# Allegro board design.brd
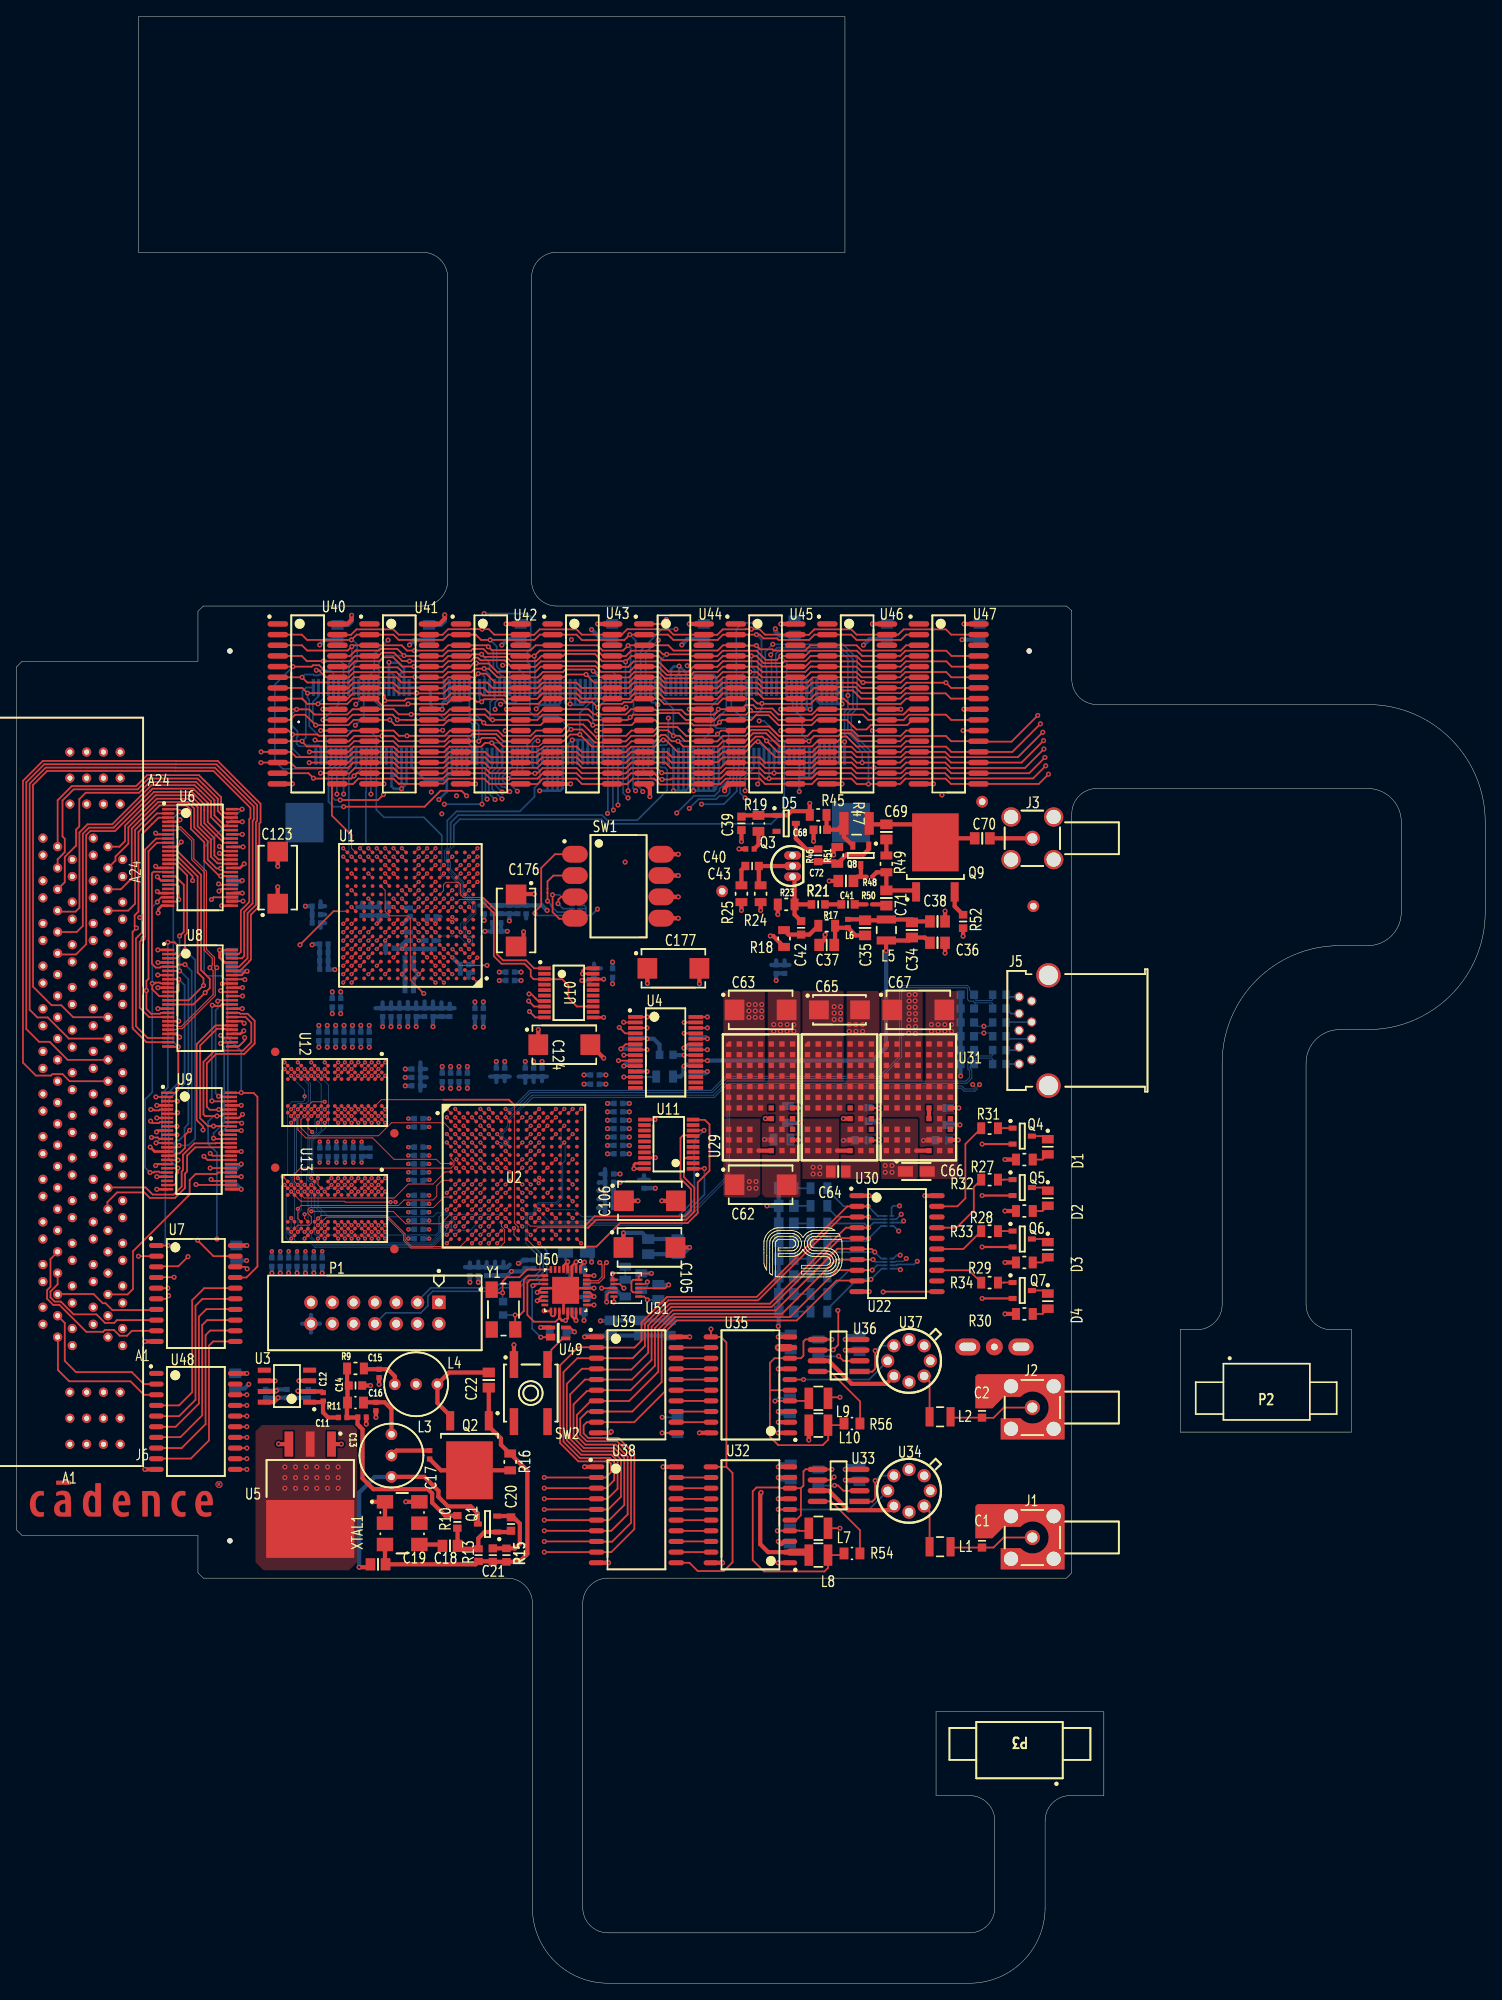
[diagram p0: board, top side]
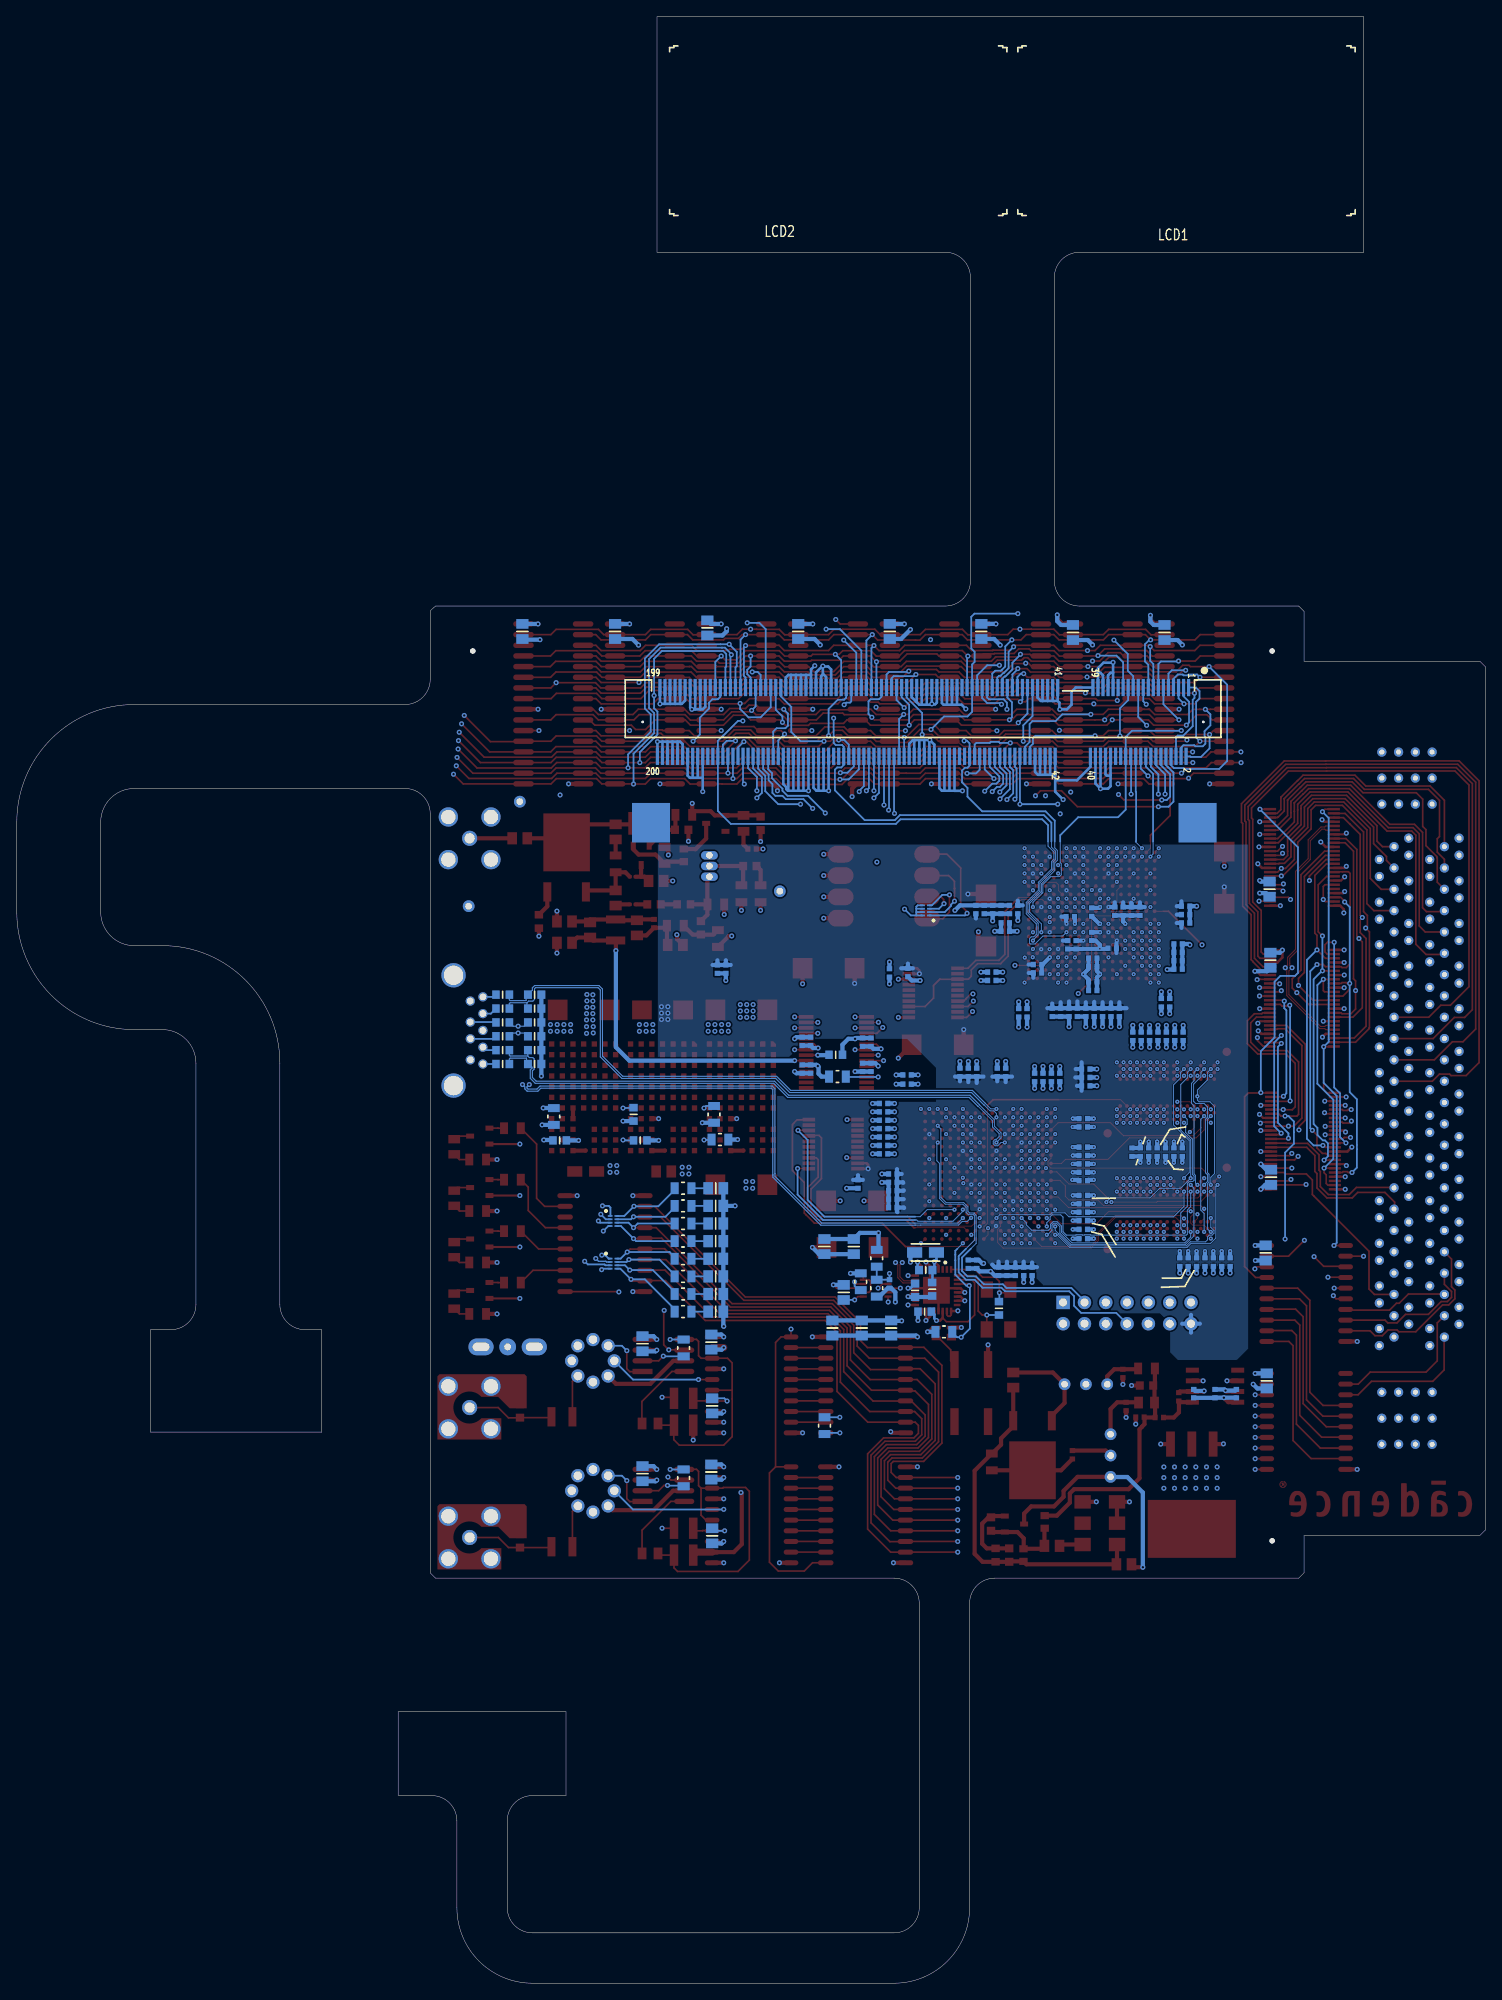
[diagram p1: board, bottom side, seen from below]

Outline 175 x 234.25 mm; copper layers: TOP, GND, INNER1, INNER2, POWER, BOTTOM. Coordinates in mm from the lower left corner of the outline.
Outline path: 0,156.84 0,53.97 0.63,53.34 21.59,53.34 21.59,48.89 22.22,48.26 58.45,48.26 arc(60.57,47.38) 61.45,45.26 61.45,9 arc(64.09,2.64) 70.45,0 113.55,0 arc(119.91,2.64) 122.55,9 122.55,19.35 arc(123.43,21.47) 125.55,22.35 129.55,22.35 129.55,32.35 109.55,32.35 109.55,22.35 113.55,22.35 arc(115.67,21.47) 116.55,19.35 116.55,9 arc(115.67,6.88) 113.55,6 70.45,6 arc(68.33,6.88) 67.45,9 67.45,45.26 arc(68.33,47.38) 70.45,48.26 125.09,48.26 125.73,48.89 125.73,139.32 arc(126.61,141.44) 128.73,142.32 161,142.32 arc(163.83,141.15) 165,138.32 165,127.6 arc(163.83,124.77) 161,123.6 157.65,123.6 arc(147.75,119.5) 143.65,109.6 143.65,80.85 arc(142.77,78.73) 140.65,77.85 138.65,77.85 138.65,65.65 159.05,65.65 159.05,77.85 156.65,77.85 arc(154.53,78.73) 153.65,80.85 153.65,109.6 arc(154.82,112.43) 157.65,113.6 161,113.6 arc(170.9,117.7) 175,127.6 175,138.32 arc(170.9,148.22) 161,152.32 128.73,152.32 arc(126.61,153.2) 125.73,155.32 125.73,163.49 125.09,164.06 64.35,164.06 arc(62.23,164.93) 61.35,167.06 61.35,203.2 arc(62.23,205.32) 64.35,206.2 98.7,206.2 98.7,234.25 14.5,234.25 14.5,206.2 48.35,206.2 arc(50.47,205.32) 51.35,203.2 51.35,167.06 arc(50.47,164.93) 48.35,164.06 22.22,164.06 21.59,163.42 21.59,157.48 0.63,157.48 0,156.84

## Design rules (mm)
constraint set DEFAULT: 
net group CLOCK: nets CLOCK+ CLOCK-
net group D: nets D+ D-
net group DATA1[0..9]: nets DATA1.CLKA DATA1.WSTAT_L
net group DP1: nets DIFF1+ DIFF1-
net group LED1: nets LED1 N828385
net group LED2: nets LED2 N852308
net group LED3: nets LED3 N852494
net group LED4: nets LED4 N852683
net group N62056: nets N62056 N62436
net group RF: nets DDS_OUT Q1E
net group STDA_SSRX: nets STDA_SSRX+ STDA_SSRX-
net group STDA_SSTX: nets STDA_SSTX+ STDA_SSTX-
net group VCLKC: nets CLKC VCLKC
net group ADDRESS: nets A0 A1 A2 A3 A4 A5 A6 A7 A8 A9 A10 A11 A12 A13 A14 A15 A16 A17 A18 A19 A20 A21 A22 A23
net group BUF_OUT: nets BUF_OUT N61996 N62230 N62316 N62564 N81780 N884986 Q2E
net group DATA: nets D0 D1 D2 D3 D4 D5 D6 D7 D9 D10 D11 D12 D13 D14 D15
net group DATA1.VD0: nets DATA1.VD0 N00671 VDX7
net group DATA1.VD1: nets DATA1.VD1 N00689 VDX6
net group DATA1.VD2: nets DATA1.VD2 N00703 VDX5
net group DATA1.VD3: nets DATA1.VD3 N00717 VDX4
net group DATA1.VD4: nets DATA1.VD4 N00827 VDX3
net group DATA1.VD5: nets DATA1.VD5 N00831 VDX2
net group DATA1.VD6: nets DATA1.VD6 N00835 VDX1
net group DATA1.VD7: nets DATA1.VD7 N00837 VDX0
net group DATA[0..20]: nets DATA.BA0 DATA.BA1 DATA.BA2 DATA.BA3 DATA.BD0 DATA.BD1 DATA.BD2 DATA.BD3 DATA.BD4 DATA.BD5 DATA.BD6 DATA.BD7 DATA.BD8 DATA.BD9 DATA.BD12 DATA.BD13 DATA.BD14 DATA.BD15 DATA.CLKB
net group DATA_DIFFS: nets DATA0+ DATA0- DATA1+ DATA1- DATA2+ DATA2- DATA3+ DATA3-
net group DDR_DQ: nets DDR_DQ0 DDR_DQ1 DDR_DQ2 DDR_DQ3 DDR_DQ4 DDR_DQ5 DDR_DQ6 DDR_DQ7 DDR_DQ8 DDR_DQ9 DDR_DQ10 DDR_DQ11 DDR_DQ12 DDR_DQ13 DDR_DQ14 DDR_DQ15 DDR_DQ16 DDR_DQ17 DDR_DQ18 DDR_DQ19 DDR_DQ20 DDR_DQ21 DDR_DQ22 DDR_DQ23 DDR_DQ24 DDR_DQ25 DDR_DQ26 DDR_DQ27 DDR_DQ28 DDR_DQ29 DDR_DQ30 DDR_DQ31
net group DDS[0..10]: nets DDS.DATA0 DDS.DATA1 DDS.DATA2 DDS.DATA3 DDS.DATA4 DDS.DATA5 DDS.DATA6 DDS.DATA7 DDS.FQUD DDS.RESET DDS.WCLK
net group MEMORY[0..29]: nets MEMORY.CTRL.RCS0 MEMORY.CTRL.RCS1 MEMORY.CTRL.RCS2 MEMORY.CTRL.RCS3 MEMORY.CTRL.RWE MEMORY.RA0 MEMORY.RA1 MEMORY.RA2 MEMORY.RA3 MEMORY.RA4 MEMORY.RA5 MEMORY.RA6 MEMORY.RA7 MEMORY.RA8 MEMORY.RA9 MEMORY.RA10 MEMORY.RA11 MEMORY.RA12 MEMORY.RA13 MEMORY.RA14 MEMORY.RA15 MEMORY.RA16 MEMORY.RD0 MEMORY.RD1 MEMORY.RD2 MEMORY.RD3 MEMORY.RD4 MEMORY.RD5 MEMORY.RD6 MEMORY.RD7
net group N00038_USER_DESIGN_OUTPUTS0_DAAMP0: nets N00038_USER_DESIGN_OUTPUTS0_DAAMP0 N00038_USER_DESIGN_OUTPUTS0_DAAMP1 N04966
net group N00046_USER_DESIGN_OUTPUTS0_DAAMP0: nets N00036_USER_DESIGN_OUTPUTS0_DAAMP0 N00046_USER_DESIGN_OUTPUTS0_DAAMP0 N00048_USER_DESIGN_OUTPUTS0_DAAMP0
net group N00046_USER_DESIGN_OUTPUTS0_DAAMP1: nets N00036_USER_DESIGN_OUTPUTS0_DAAMP1 N00046_USER_DESIGN_OUTPUTS0_DAAMP1 N00048_USER_DESIGN_OUTPUTS0_DAAMP1
net group N111881: nets N111502 N111881 N113142 N114006 N118214 N118917 N120412 N121910 N123723 N124926 N129422 N221560
net group POWER_GROUP: nets 5V
net group STEVE: nets N830942

## Placement (name value [footprint] x y rotation side)
C1  47 pF  [CAPC1608X86N]  115.03 52.7 90 top
C2  47 pF  [CAPC1608X86N]  115.03 68.17 90 top
C3  3300 pF  [CAPC2012X71N]  91.7 94.7 180 bottom
C4  3300 pF  [CAPC2012X71N]  91.7 86.3 180 bottom
C5  3300 pF  [CAPC2012X71N]  91.7 92.6 180 bottom
C6  3300 pF  [CAPC2012X71N]  91.7 84.2 180 bottom
C7  3300 pF  [CAPC2012X71N]  91.7 90.5 180 bottom
C8  3300 pF  [CAPC2012X71N]  91.7 82.1 180 bottom
C9  3300 pF  [CAPC2012X71N]  91.7 88.4 180 bottom
C10  3300 pF  [CAPC2012X71N]  91.7 80 180 bottom
C11  1000 pF  [CAPC1005X56N]  38.84 67.39 0 top
C12  1000 pF  [CAPC1005X56N]  36.52 69.85 270 top
C13  1000 pF  [CAPC1005X56N]  41.15 67.43 180 top
C14  0.01 uF  [CAPC1608X86N]  40.36 71.2 180 top
C15  1000 pF  [CAPC1005X56N]  43.18 72.64 90 top
C16  1000 pF  [CAPC1005X56N]  42.8 68.7 90 top
C17  1000 pF  [CAPC1005X56N]  49.2 62.95 270 top
C18  100 pF  [CAPC2012X70N]  51.63 52.1 180 top
C19  22 pF  [CAPC2012X71N]  43.05 49.9 0 top
C20  47 pF  [CAPC1608X86N]  58.9 54.7 90 top
C21  47 pF  [CAPC1608X86N]  56.73 51 90 top
C22  22 pF  [CAPC2012X71N]  56.25 71.85 270 top
C23  1000 pF  [CAPC1005X56N]  73.2 109.1 90 bottom
C24  1000 pF  [CAPC1005X56N]  81.4 108.9 90 bottom
C25  1000 pF  [CAPC1005X56N]  74.2 109.1 90 bottom
C26  1000 pF  [CAPC1005X56N]  80.4 108.9 90 bottom
C27  1000 pF  [CAPC1005X56N]  73.2 112.1 90 bottom
C28  1000 pF  [CAPC1005X56N]  80.4 112.2 90 bottom
C29  1000 pF  [CAPC1005X56N]  81.4 112.2 90 bottom
C30  1000 pF  [CAPC1005X56N]  74.2 112.1 90 bottom
C31  1000 pF  [CAPC1005X56N]  34.74 70.23 270 bottom
C32  1000 pF  [CAPC1005X56N]  32.2 70.23 270 bottom
C33  1000 pF  [CAPC1005X56N]  29.66 70.23 270 bottom
C34  3.3 pF  [CAPC2012X88N]  106.68 125.47 270 top
C35  8.2 pF  [CAPC2012X140N]  101.09 125.72 270 top
C36  22 pF  [CAPC2012X71N]  109.73 123.94 180 top
C37  22 pF  [CAPC2012X71N]  96.52 123.69 0 top
C38  33 pF  [CAPC2012X71N]  109.73 126.48 0 top
C39  0.01 uF  [CAPC1608X86N]  86.36 138.17 90 top
C40  1000 pF  [CAPC1005X56N]  87.38 135.12 0 top
C41  0.01 uF  [CAPC1608X86N]  99.06 128.51 0 top
C42  0.01 uF  [CAPC1608X86N]  93.47 125.72 90 top
C43  0.01 uF  [CAPC1608X86N]  87.63 133.09 0 top
C44  0.1 uF  [CAPC2012X100N]  25.53 96.01 270 bottom
C45  0.1 uF  [CAPC2012X100N]  26.16 86.99 270 bottom
C46  0.1 uF  [CAPC2012X100N]  25.6 121.86 90 bottom
C47  0.1 uF  [CAPC2012X100N]  25.7 130.33 270 bottom
C48  0.1 uF  [CAPC2012X100N]  92.7 161.45 270 bottom
C49  0.1 uF  [CAPC2012X100N]  49.13 160.9 270 bottom
C50  0.1 uF  [CAPC2012X100N]  103.7 161.03 270 bottom
C51  0.1 uF  [CAPC2012X100N]  60.05 161.03 270 bottom
C52  0.1 uF  [CAPC2012X100N]  81.88 161.03 270 bottom
C53  0.1 uF  [CAPC2012X100N]  38.22 160.9 270 bottom
C54  0.1 uF  [CAPC2012X100N]  70.96 161.03 270 bottom
C55  0.1 uF  [CAPC2012X100N]  114.74 161.03 270 bottom
C62  10 uF  [CAPMP7343X310N]  88.65 95.12 0 top
C63  100 uF  [CAPMP7343X310N]  88.65 115.95 0 top
C64  2.2 uF  [CAPC2012X71N]  97.9 96.7 0 top
C65  47 uF  [CAPMP6032X280N]  98.04 115.95 0 top
C66  4.7 uF  [CAPMP3216X180N]  107.2 96.7 0 top
C67  100 uF  [CAPMP7343X310N]  107.44 115.95 0 top
C68  0.01 uF  [CAPC1608X86N]  95.76 137.4 0 top
C69  0.47 uF  [CAPC2012X71N]  103.63 137.15 270 top
C70  0.47 uF  [CAPC2012X71N]  115.06 136.39 0 top
C71  0.47 uF  [CAPC2012X71N]  103.63 129.28 90 top
C72  0.01 uF  [CAPC2012X71N]  98.81 131.31 0 top
C73  22 pF  [CAPC1005X56N]  32.4 85.9 270 bottom
C74  22 pF  [CAPC1005X56N]  31.4 85.9 270 bottom
C75  22 pF  [CAPC1005X56N]  30.4 85.9 270 bottom
C76  22 pF  [CAPC1005X56N]  42.1 99 90 bottom
C77  22 pF  [CAPC1005X56N]  36.1 99 90 bottom
C78  22 pF  [CAPC1005X56N]  37.1 99 90 bottom
C79  22 pF  [CAPC1005X56N]  38.1 99 90 bottom
C80  22 pF  [CAPC1005X56N]  39.1 99 90 bottom
C81  220 pF  [CAPC1005X56N]  42 112.8 90 bottom
C82  220 pF  [CAPC1005X56N]  38 112.8 90 bottom
C83  220 pF  [CAPC1005X56N]  39 112.8 90 bottom
C84  220 pF  [CAPC1005X56N]  40 112.8 90 bottom
C85  2200 pF  [CAPC1005X56N]  47.9 95.6 180 bottom
C86  2200 pF  [CAPC1005X56N]  53.7 107.9 270 bottom
C87  2200 pF  [CAPC1005X56N]  51.7 107.9 270 bottom
C88  2200 pF  [CAPC1005X56N]  52.7 107.9 270 bottom
C89  22 pF  [CAPC1005X56N]  61.6 108.5 90 bottom
C90  22 pF  [CAPC1005X56N]  62.6 108.5 90 bottom
C91  22 pF  [CAPC1005X56N]  35.7 126.3 180 bottom
C92  22 pF  [CAPC1005X56N]  53.35 120.35 180 bottom
C93  22 pF  [CAPC1005X56N]  53.35 121.35 180 bottom
C94  22 pF  [CAPC1005X56N]  44.45 123.3 0 bottom
C95  22 pF  [CAPC1005X56N]  35.7 127.3 180 bottom
C96  22 pF  [CAPC1005X56N]  41.15 127.7 270 bottom
C97  22 pF  [CAPC1005X56N]  47.6 115.65 270 bottom
C98  22 pF  [CAPC1005X56N]  48.6 115.65 270 bottom
C99  220 pF  [CAPC1005X56N]  55 84.8 270 bottom
C100  220 pF  [CAPC1005X56N]  91.5 120.8 270 bottom
C101  220 pF  [CAPC1005X56N]  43.6 115.65 270 bottom
C102  220 pF  [CAPC1005X56N]  44.6 115.65 270 bottom
C103  220 pF  [CAPC1005X56N]  45.6 115.65 270 bottom
C104  220 pF  [CAPC1005X56N]  46.6 115.65 270 bottom
C105  470 uF  [CAPMP7343X430N]  75.4 87.65 0 top
C106  470 uF  [CAPMP7343X430N]  75.45 93.2 0 top
C107  22 pF  [CAPC1005X56N]  46.77 121.09 0 bottom
C108  22 pF  [CAPC1005X56N]  71 120.35 90 bottom
C109  22 pF  [CAPC1005X56N]  59.7 127.9 90 bottom
C110  22 pF  [CAPC1005X56N]  57.7 127.9 90 bottom
C111  22 pF  [CAPC1005X56N]  56.7 127.9 90 bottom
C112  220 pF  [CAPC1005X56N]  36.6 120.8 0 bottom
C113  220 pF  [CAPC1005X56N]  46.77 122.12 0 bottom
C114  220 pF  [CAPC1005X56N]  71.7 103.8 0 bottom
C115  2200 pF  [CAPC1005X56N]  71.7 101.8 0 bottom
C116  2200 pF  [CAPC1005X56N]  49.6 115.65 270 bottom
C117  220 pF  [CAPC1005X56N]  55.7 127.9 270 bottom
C118  220 pF  [CAPC1005X56N]  44.15 127.7 270 bottom
C119  220 pF  [CAPC1005X56N]  50.6 115.65 270 bottom
C120  2200 pF  [CAPC1005X56N]  42.15 127.7 270 bottom
C121  2200 pF  [CAPC1005X56N]  43.15 127.7 270 bottom
C122  2200 pF  [CAPC1005X56N]  49.75 123.7 270 bottom
C123  470 uF  [CAPMP7343X430N]  31.1 131.7 90 top
C124  470 uF  [CAPMP7343X430N]  65.25 111.8 0 top
C125  22 pF  [CAPC1005X56N]  47.9 103 180 bottom
C126  22 pF  [CAPC1005X56N]  47.9 102 180 bottom
C127  22 pF  [CAPC1005X56N]  46.9 124.7 270 bottom
C128  22 pF  [CAPC1005X56N]  46.9 127.6 270 bottom
C129  22 pF  [CAPC1005X56N]  57.2 126.31 0 bottom
C130  220 pF  [CAPC1005X56N]  55.6 115.6 270 bottom
C131  220 pF  [CAPC1005X56N]  54.6 115.6 270 bottom
C132  220 pF  [CAPC1005X56N]  37.6 116.8 270 bottom
C133  2200 pF  [CAPC1005X56N]  71.7 100.8 0 bottom
C134  22 pF  [CAPC1005X56N]  47.9 90.85 180 bottom
C135  22 pF  [CAPC1005X56N]  47.9 98.6 180 bottom
C136  22 pF  [CAPC1005X56N]  47.9 97.6 180 bottom
C137  22 pF  [CAPC1005X56N]  47.9 92.85 180 bottom
C138  22 pF  [CAPC1005X56N]  47.9 91.85 180 bottom
C139  22 pF  [CAPC1005X56N]  41 112.8 90 bottom
C140  220 pF  [CAPC1005X56N]  71.7 104.8 0 bottom
C141  220 pF  [CAPC1005X56N]  71.7 98.8 0 bottom
C142  2200 pF  [CAPC1005X56N]  47.9 99.6 180 bottom
C143  2200 pF  [CAPC1005X56N]  47.9 96.6 180 bottom
C144  22 pF  [CAPC1005X56N]  54 84.8 270 bottom
C145  22 pF  [CAPC1005X56N]  70.6 92.4 0 bottom
C146  22 pF  [CAPC1005X56N]  47.6 108.9 180 bottom
C147  22 pF  [CAPC1005X56N]  48.75 123.7 270 bottom
C148  22 pF  [CAPC1005X56N]  90.5 120.8 270 bottom
C149  22 pF  [CAPC1005X56N]  68.8 120.4 270 bottom
C150  22 pF  [CAPC1005X56N]  74.75 95.2 270 bottom
C151  22 pF  [CAPC1005X56N]  49.45 127.05 180 bottom
C152  22 pF  [CAPC1005X56N]  35.7 128.3 180 bottom
C153  22 pF  [CAPC1005X56N]  51.6 115.65 270 bottom
C154  220 pF  [CAPC1005X56N]  70.6 95.4 0 bottom
C155  220 pF  [CAPC1005X56N]  70.6 94.4 0 bottom
C156  220 pF  [CAPC1005X56N]  47.6 106.9 180 bottom
C157  220 pF  [CAPC1005X56N]  70.6 93.4 0 bottom
C158  220 pF  [CAPC1005X56N]  58.15 108.5 90 bottom
C159  220 pF  [CAPC1005X56N]  60.6 108.5 90 bottom
C160  22 pF  [CAPC1005X56N]  36.6 122.8 0 bottom
C161  22 pF  [CAPC1005X56N]  46.77 119.29 0 bottom
C162  22 pF  [CAPC1005X56N]  58.7 127.9 90 bottom
C163  22 pF  [CAPC1005X56N]  36.6 123.8 0 bottom
C164  22 pF  [CAPC1005X56N]  46.77 118.26 0 bottom
C165  220 pF  [CAPC1005X56N]  58.8 120.45 0 bottom
C166  220 pF  [CAPC1005X56N]  58.8 119.45 0 bottom
C167  220 pF  [CAPC1005X56N]  36.6 121.8 0 bottom
C168  2200 pF  [CAPC1005X56N]  71.7 102.8 0 bottom
C169  2200 pF  [CAPC1005X56N]  60.7 127.9 90 bottom
C170  220 pF  [CAPC1005X56N]  56 84.8 270 bottom
C171  220 pF  [CAPC1005X56N]  47.6 107.9 180 bottom
C172  220 pF  [CAPC1005X56N]  57.15 108.5 90 bottom
C173  2200 pF  [CAPC1005X56N]  70.6 96.4 0 bottom
C174  2200 pF  [CAPC1005X56N]  58 84.8 270 bottom
C175  2200 pF  [CAPC1005X56N]  57 84.8 270 bottom
C176  470 uF  [CAPMP7343X430N]  59.5 126.6 270 top
C177  470 uF  [CAPMP7343X430N]  78.25 120.9 0 top
C178  22 pF  [CAPC1005X56N]  60.6 85.65 270 bottom
C179  22 pF  [CAPC1005X56N]  47.9 89.8 180 bottom
C180  22 pF  [CAPC1005X56N]  47.9 88.7 180 bottom
C181  22 pF  [CAPC1005X56N]  68.9 107.1 180 bottom
C182  22 pF  [CAPC1005X56N]  68.9 108.2 180 bottom
C183  220 pF  [CAPC1005X56N]  57.2 125.31 0 bottom
C184  220 pF  [CAPC1005X56N]  38.6 116.8 270 bottom
C185  220 pF  [CAPC1005X56N]  61.6 85.65 270 bottom
C186  2200 pF  [CAPC1005X56N]  71.7 99.8 0 bottom
C187  22 pF  [CAPC1005X56N]  36.4 85.9 270 bottom
C188  22 pF  [CAPC1005X56N]  40.1 99 90 bottom
C189  22 pF  [CAPC1005X56N]  34.4 85.9 270 bottom
C190  22 pF  [CAPC1005X56N]  33.4 85.9 270 bottom
C191  22 pF  [CAPC1005X56N]  41.1 99 90 bottom
C192  22 pF  [CAPC1005X56N]  35.4 85.9 270 bottom
C193  220 pF  [CAPC1005X56N]  36 112.8 90 bottom
C194  220 pF  [CAPC1005X56N]  37 112.8 90 bottom
C195  2200 pF  [CAPC1005X56N]  50.7 107.9 270 bottom
C196  2200 pF  [CAPC1005X56N]  47.9 93.85 180 bottom
C197  0.1 uF  [CAPC2012X100N]  92.23 60.9 90 bottom
C198  0.1 uF  [CAPC2012X100N]  92.13 53.3 270 bottom
C199  0.1 uF  [CAPC2012X100N]  100.43 60.7 270 bottom
C200  0.1 uF  [CAPC2012X100N]  92.23 76.38 90 bottom
C201  0.1 uF  [CAPC2012X100N]  92.13 68.78 270 bottom
C202  0.1 uF  [CAPC2012X100N]  100.43 76.18 270 bottom
C2000  33 pF  [CAPC1608X86N]  113.28 114.45 180 bottom
C2001  33 pF  [CAPC1608X86N]  113.28 112.8 180 bottom
C2002  33 pF  [CAPC1608X86N]  113.28 116.11 180 bottom
C2003  33 pF  [CAPC1608X86N]  113.28 117.76 180 bottom
C2004  33 pF  [CAPC1608X86N]  113.28 109.5 180 bottom
C2005  33 pF  [CAPC1608X86N]  113.28 111.15 180 bottom
C2006  0.1 uF  [CAPC2012X100N]  26.04 71.75 270 bottom
C2007  0.01 uF  [CAPC1608X86N]  67.94 82.55 270 bottom
C2008  22 uF  [CAPMP3216X120N]  66.7 87.05 0 bottom
C2009  0.01 uF  [CAPC1608X86N]  66.67 84.96 0 bottom
C2010  1000 pF  [CAPC1005X56N]  70.99 83.31 270 bottom
C2011  0.1 uF  [CAPC2012X100N]  77.8 78.05 270 bottom
C2012  0.1 uF  [CAPC2012X100N]  74.3 78.05 270 bottom
C2013  0.1 uF  [CAPC2012X100N]  70.8 78.05 270 bottom
C2014  0.1 uF  [CAPC2012X100N]  78.75 87.75 270 bottom
C2015  0.1 uF  [CAPC2012X100N]  75.25 87.75 270 bottom
C2016  0.1 uF  [CAPC2012X100N]  76.45 82.29 90 bottom
D1  GREEN  [LEDC2012X120N]  122.87 99.64 270 top
D2  GREEN  [LEDC2012X120N]  122.87 93.51 270 top
D3  GREEN  [LEDC2012X120N]  122.87 87.38 270 top
D4  GREEN  [LEDC2012X120N]  122.87 81.25 270 top
D5  MMBD4148  [SOT95P230X109-3N]  91.69 138.17 0 top
J1  901-9894-RFX  [SMB_90]  121.03 53.1 270 top
J2  901-9894-RFX  [SMB_90]  121.03 68.58 270 top
J3  901-9894-RFX  [SMB_90]  121.03 136.39 270 top
J5  AU-Y1005-3-R  [USB3A_FEMALE]  119.45 113.5 90 top
J6  6367550-6  [C-1367550-6]  6.33 64.2 90 top
J7  1473005-1  [C_1_1473005_1_J1]  66.85 150.25 270 bottom
L1  47 nH  [INDC2520X220N]  110.03 52 0 top
L2  47 nH  [INDC2520X220N]  110.03 67.48 0 top
L3  INDUCTOR3  [TOROID01_3]  44.65 65.4 270 top
L4  INDUCTOR3  [TOROID01_3]  45.05 71.35 0 top
L5  1.0 uH  [INDC2520X220N]  103.63 125.47 90 top
L6  6.8 nH  [INDC1005X60N]  99.06 126.23 270 top
L7  56 nH  [IND_CENTRAL_1008]  95.53 54.2 180 top
L8  56 nH  [IND_CENTRAL_1008]  95.53 51 0 top
L9  56 nH  [IND_CENTRAL_1008]  95.53 69.68 180 top
L10  56 nH  [IND_CENTRAL_1008]  95.53 66.48 0 top
LCD1  S1D13742F01A200  [LCD_EA_8081-A3N-B]  35.6 220.68 180 bottom
LCD2  S1D13742F01A200  [LCD_EA_8081-A3N-B]  77.1 220.68 180 bottom
NOREF  -  []  25.4 52.7 0 top
NOREF#2  -  []  -0.13 150.49 0 top
NOREF#3  -  [unnamed#2]  25.4 52.7 0 top
NOREF#4  -  [unnamed#3]  116.5 75.8 0 top
NOREF#5  -  [unnamed#2]  120.65 158.7 0 top
NOREF#6  -  [unnamed#4]  70.6 121.7 0 top
NOREF#7  -  [unnamed#2]  25.4 158.7 0 top
NOREF#8  -  []  25.4 52.7 0 top
P1  TST-107-01-G-D  [SAMTEC_TST-107-XX-X-D]  50.3 81.1 180 top
P2  53261-0819  [MOLEX_53261-8_FITNAIL]  148.9 69.7 0 top
P3  53261-0819  [MOLEX_53261-8_FITNAIL]  119.55 28.51 180 top
Q1  2N2222AUB  [SOT95P230X109-3N]  56.1 54.7 180 top
Q2  MMBFJ310LT1G  [TO230P950X240-3N]  53.95 62.9 270 top
Q3  2N3866  [TO92]  92.46 131.82 180 top
Q4  KST3904  [SOT95P240X114-3N]  119.82 100.91 0 top
Q5  KST3904  [SOT95P240X114-3N]  119.82 94.78 0 top
Q6  KST3904  [SOT95P240X114-3N]  119.82 88.65 0 top
Q7  KST3904  [SOT95P240X114-3N]  119.82 82.52 0 top
Q8  2N3905  [SOT95P230X109-3N]  100.58 134.36 270 top
Q9  2N5179-NRC  [TO230P950X240-3N]  109.47 134.1 90 top
R1  243 Ohm  [RESC2012X60N]  95.6 94.7 0 bottom
R2  243 Ohm  [RESC2012X60N]  95.6 86.3 0 bottom
R3  243 Ohm  [RESC2012X60N]  95.6 92.6 0 bottom
R4  243 Ohm  [RESC2012X60N]  95.6 84.2 0 bottom
R5  243 Ohm  [RESC2012X60N]  95.6 90.5 0 bottom
R6  243 Ohm  [RESC2012X60N]  95.6 82.1 0 bottom
R7  243 Ohm  [RESC2012X60N]  95.6 88.4 0 bottom
R8  243 Ohm  [RESC2012X60N]  95.6 80 0 bottom
R9  330 Ohm  [RESC2012X60N]  40.36 73.23 180 top
R10  10 kOhm  [RESC1608X50N]  52.5 54.95 90 top
R11  97.6 Ohm  [RESC2012X70N]  40.36 69.17 0 top
R12  2.0 kOhm  [RESC1608X55N]  77.4 110.6 0 bottom
R13  10 kOhm  [RESC1608X50N]  55.03 51 90 top
R14  3.9 kOhm  [RESC2012X50N]  77.2 108 180 bottom
R15  2.0 kOhm  [RESC1608X55N]  58.35 51 90 top
R16  220 Ohm  [RESC2012X60N]  58.8 62.1 270 top
R17  180 Ohm  [RESC2012X60N]  96.52 125.97 180 top
R18  56 Ohm  [RESC2012X60N]  91.44 124.45 90 top
R19  97.6 Ohm  [RESC2012X70N]  88.39 138.17 90 top
R21  2.0 kOhm  [RESC1608X55N]  95.5 128.51 0 top
R23  470 Ohm  [RESC2012X60N]  91.69 128.51 0 top
R24  56 Ohm  [RESC2012X60N]  88.65 129.78 90 top
R25  56 Ohm  [RESC2012X60N]  86.36 129.78 90 top
R26  49.9 Ohm  [RESC2012X60N]  78.74 66.42 270 bottom
R27  470 Ohm  [RESC2012X60N]  120.08 98.12 0 top
R28  470 Ohm  [RESC2012X60N]  120.08 91.99 0 top
R29  470 Ohm  [RESC2012X60N]  120.08 85.86 0 top
R30  470 Ohm  [RESC2012X60N]  120.08 79.73 0 top
R31  150 Ohm  [RESC2012X60N]  115.94 101.85 0 top
R32  150 Ohm  [RESC2012X60N]  115.94 95.72 0 top
R33  150 Ohm  [RESC2012X60N]  115.94 89.59 0 top
R34  150 Ohm  [RESC2012X60N]  115.94 83.46 0 top
R39  105 kOhm  [RESC2012X60N]  91.9 103.5 270 bottom
R40  -  [RESC2012X60N]  91.2 100.5 180 bottom
R41  61.9 kOhm  [RESC1608X55N]  101.5 103.5 270 bottom
R42  226 kOhm  [RESC1608X55N]  100.7 100.4 180 bottom
R43  118 kOhm  [RESC2012X60N]  111 103.25 270 bottom
R44  154 kOhm  [RESC1608X55N]  110.3 100.4 180 bottom
R45  470 Ohm  [RESC2012X60N]  95.5 139.18 180 top
R46  3.0 kOhm  [RESC1608X50N]  95.5 134.36 90 top
R47  270 Ohm  [RESC3225X70N]  100.08 138.17 180 top
R48  24 kOhm  [RESC0603X26N]  101.6 131.82 180 top
R49  470 Ohm  [RESC2012X60N]  103.63 133.34 90 top
R50  49.9 Ohm  [RESC0603X30N]  101.6 128.51 0 top
R51  6.8 kOhm  [RESC2012X60N]  97.79 134.36 90 top
R52  3.3 Ohm  [RESC1608X55N]  112.78 126.48 90 top
R53  97.6 Ohm  [RESC2012X50N]  95.53 60.2 270 bottom
R54  97.6 Ohm  [RESC2012X70N]  99.53 51.2 0 top
R55  97.6 Ohm  [RESC2012X50N]  95.53 75.68 270 bottom
R56  97.6 Ohm  [RESC2012X70N]  99.53 66.67 0 top
R2000  27.4 Ohm  [RESC1608X55N]  117.09 112.8 180 bottom
R2001  27.4 Ohm  [RESC1608X55N]  117.09 114.45 180 bottom
R2002  27.4 Ohm  [RESC1608X55N]  117.09 117.76 180 bottom
R2003  27.4 Ohm  [RESC1608X55N]  117.09 116.11 180 bottom
R2004  27.4 Ohm  [RESC1608X55N]  117.09 111.15 180 bottom
R2005  27.4 Ohm  [RESC1608X55N]  117.09 109.5 180 bottom
R2006  10  [RESC1608X55N]  65.91 82.67 90 bottom
R2007  2.0 kOhm  [RESC1608X55N]  66.8 80 0 bottom
R2008  100 kOhm  [RESC2012X60N]  64.52 77.59 180 bottom
R2009  2.0 kOhm  [RESC1608X55N]  57.95 80.4 90 bottom
R2010  10 kOhm  [RESC2012X60N]  72.52 86.36 270 bottom
R2011  10 kOhm  [RESC2012X60N]  72.52 82.8 270 bottom
R2012  100 kOhm  [RESC2012X60N]  74.42 83.56 270 bottom
RN1  47 Ohms  [RESNET_8]  66.65 127.8 0 bottom
RN2  100 Ohm  [RESNET_8]  103.89 85.72 180 bottom
RN3  100 Ohm  [RESNET_8]  103.89 90.8 180 bottom
SW1  76HPSB04GWRT  [SOIC254P1077X800-8M]  71.12 130.68 0 top
SW2  EVQPH  [SW_EVQ-PH_NO_GND]  61.25 70.3 0 top
U1  XC6SLX25-3FTG256  [FT256]  46.9 127.2 180 top
U2  XC6SLX25-3FTG256  [FT256]  59.25 96.15 0 top
U3  L78L08ACD13TR  [SOIC127P600X175-8N]  32.2 71.12 180 top
U4  AD9850BRSZ  [SOP65P780X200-28N]  77.32 110.88 0 top
U5  LM340  [TO254P1410X464-4N]  34.97 58.22 270 top
U6  74ALVT16245DGG,118  [SOP50P810X110-48N]  21.84 134.11 0 top
U7  74ACT245  [SOIC127P1028X265-20N]  21.34 82.16 0 top
U8  74ALVT16245DGG,118  [SOP50P810X110-48N]  21.84 117.34 0 top
U9  74ALVT16245DGG,118  [SOP50P810X110-48N]  21.72 100.33 0 top
U10  XCF01SVOG20C  [XCF01SVOG20]  65.79 117.98 0 top
U11  XCF01SVOG20C  [XCF01SVOG20]  77.7 99.95 180 top
U12  MT47H64M16HR-3:G TR  [MT47H128M]  37.9 106.1 270 top
U13  MT47H64M16HR-3:G TR  [MT47H128M]  37.9 92.3 270 top
U22  74HCT574  [SOIC127P1032X265-20AN]  104.9 88.1 0 top
U29  LTM8025EV#PBF  [LTUMODULE7X11]  88.65 105.53 0 top
U30  LTM8025EV#PBF  [LTUMODULE7X11]  98.04 105.53 0 top
U31  LTM8025EV#PBF  [LTUMODULE7X11]  107.44 105.53 0 top
U32  TLC5602CDWR  [SOIC127P1028X265-20N]  87.43 55.8 180 top
U33  DG419CY+  [SOG0508WG244L225]  100.43 57.4 90 top
U34  TLE2037AQDRG4Q1  [TO99]  106.33 61.2 180 top
U35  TLC5602CDWR  [SOIC127P1028X265-20N]  87.43 71.28 180 top
U36  DG419CY+  [SOG0508WG244L225]  100.43 72.88 90 top
U37  TLE2037AQDRG4Q1  [TO99]  106.33 76.68 180 top
U38  74HCT574  [SOIC127P1032X265-20AN]  73.84 55.8 0 top
U39  74HCT574  [SOIC127P1032X265-20AN]  73.84 71.28 0 top
U40  UPD431000AGW-B15  [SOJ127P866X375-32N]  34.66 152.39 0 top
U41  UPD431000AGW-B15  [SOJ127P866X375-32N]  45.58 152.39 0 top
U42  UPD431000AGW-B15  [SOJ127P866X375-32N]  56.49 152.39 0 top
U43  UPD431000AGW-B15  [SOJ127P866X375-32N]  67.41 152.39 0 top
U44  UPD431000AGW-B15  [SOJ127P866X375-32N]  78.32 152.39 0 top
U45  UPD431000AGW-B15  [SOJ127P866X375-32N]  89.23 152.39 0 top
U46  UPD431000AGW-B15  [SOJ127P866X375-32N]  100.15 152.39 0 top
U47  UPD431000AGW-B15  [SOJ127P866X375-32N]  111.06 152.39 0 top
U48  74ACT245  [SOIC127P1028X265-20N]  21.34 66.92 0 top
U49  MAX6711S  [SOT343N]  64.52 77.47 0 top
U50  NBC12429AMNR4G  [QFN50P500X500X100-33N]  65.41 82.55 270 top
U51  TPS51200DRCR  [DRC10_2P4X1P65]  72.64 82.8 0 top
XTAL1  100 MHz  [OSCSC254P500X700X200-6N]  45.93 54.8 0 top
Y1  20 MHz  [OSCCC350X600X120N]  58 80.25 0.2 top

## Library data of the parts
C1 = CAP: room: CHAN1
C2 = CAP: room: CHAN2
C3-C10 = CAP: signal model: DEFAULT_CAPACITOR_3300pF_1_2
C11-C13 C15-C17 C31-C33 = CAP: signal model: DEFAULT_CAPACITOR_1000pF_1_2
C14 = CAP: signal model: DEFAULT_CAPACITOR_10000pF_1_2
C18 = CAP: signal model: DEFAULT_CAPACITOR_100.000000pF_1_2
C19 C22 C73-C80 C89-C98 C125-C129 C134-C139 C144-C153 C178-C182 C187-C192 = CAP: signal model: DEFAULT_CAPACITOR_22.000000pF_1_2
C20 C21 = CAP: signal model: DEFAULT_CAPACITOR_47.000000pF_1_2
C23-C30 C107-C115 C160-C168 C2000-C2005 C2007 C2009-C2016 = CAP
C34-C43 = CAP: room: RF-AMP
C44-C47 C2006 = CAP: signal model: DEFAULT_CAPACITOR_100000pF_1_2
C48-C55 = CAP: signal model: DEFAULT_CAPACITOR_100000pF_1_2; room: BOTTOM_MEM
C62 = CAP_P: signal model: DEFAULT_CAPACITOR_1e+07pF_1_2
C63 = CAP_P: signal model: DEFAULT_CAPACITOR_1e+08pF_1_2
C64 = CAP: signal model: DEFAULT_CAPACITOR_2.2e+06pF_1_2
C65 = CAP_P: signal model: DEFAULT_CAPACITOR_4.7e+07pF_1_2
C66 = CAP_P: signal model: DEFAULT_CAPACITOR_4.7e+06pF_1_2
C67 C2008 = CAP_P
C68 C72 = CAP: signal model: DEFAULT_CAPACITOR_10000pF_1_2; room: RF-AMP
C69-C71 = CAP: signal model: DEFAULT_CAPACITOR_470000pF_1_2; room: RF-AMP
C81-C84 C99-C104 C117-C119 C130-C132 C140 C141 C154-C159 C170-C172 C183-C185 C193 C194 = CAP: signal model: DEFAULT_CAPACITOR_220.000000pF_1_2
C85-C88 C116 C120-C122 C133 C142 C143 C169 C173-C175 C186 C195 C196 = CAP: signal model: DEFAULT_CAPACITOR_2200pF_1_2
C105 C106 C123 C124 C176 C177 = CAP_P: signal model: DEFAULT_CAPACITOR_4.7e+08pF_1_2
C197-C199 = CAP: signal model: DEFAULT_CAPACITOR_100000pF_1_2; room: CHAN1
C200-C202 = CAP: signal model: DEFAULT_CAPACITOR_100000pF_1_2; room: CHAN2
D1-D4 = LED
D5 = DIODE_A_NC_C: room: RF-AMP
J1 = BNC-4: User Part Number: PSL-00000003; room: CHAN1
J2 = BNC-4: User Part Number: PSL-00000003; room: CHAN2
J3 = BNC-4: User Part Number: PSL-00000003
J5 = usb3a_female: User Part Number: PSL-00000013
J6 = CONN_C1367550_6
J7 = conn_dimm_200: room: BOTTOM_MEM
L1 = IND: room: CHAN1
L2 = IND: room: CHAN2
L3 L4 = INDUCTOR3
L5 L6 = IND: room: RF-AMP
L7 L8 = IND: signal model: DEFAULT_INDUCTOR_56.000000nH_1_2; room: CHAN1
L9 L10 = IND: signal model: DEFAULT_INDUCTOR_56.000000nH_1_2; room: CHAN2
LCD1 LCD2 = LCD-EA-8081-A3N
P1 = HDR_2X7_M
P2 P3 = HDR_1X8_M
Q1 Q4-Q7 = BJT_NPN_BEC
Q2 = MOSFET_I_EN_GSD
Q3 Q9 = BJT_NPN_BEC: room: RF-AMP
Q8 = BJT_PNP_BCE: room: RF-AMP
R1-R8 = RES: signal model: DEFAULT_RESISTOR_243.000000OHM_1_2
R9 = RES: signal model: DEFAULT_RESISTOR_330.000000OHM_1_2
R10 R13 = RES: signal model: DEFAULT_RESISTOR_10000OHM_1_2
R11 = RES: signal model: DEFAULT_RESISTOR_97.600000OHM_1_2
R12 R15 = RES: signal model: DEFAULT_RESISTOR_2000OHM_1_2
R14 = RES: signal model: DEFAULT_RESISTOR_3900OHM_1_2
R16 = RES: signal model: DEFAULT_RESISTOR_220.000000OHM_1_2
R17-R19 R21 R23-R25 = RES: room: RF-AMP
R26 = RES: signal model: DEFAULT_RESISTOR_49.900000OHM_1_2
R27-R30 = RES: signal model: DEFAULT_RESISTOR_470.000000OHM_1_2
R31-R34 = RES: signal model: DEFAULT_RESISTOR_150.000000OHM_1_2
R39 = RES: signal model: DEFAULT_RESISTOR_105000OHM_1_2
R40 = RES_RESC2012X60N_DISCRETE_953 KOHM_PSL-00000020: signal model: DEFAULT_RESISTOR_953000OHM_1_2
R41 = RES: signal model: DEFAULT_RESISTOR_61900OHM_1_2
R42 = RES: signal model: DEFAULT_RESISTOR_226000OHM_1_2
R43 = RES: signal model: DEFAULT_RESISTOR_118000OHM_1_2
R44 = RES: signal model: DEFAULT_RESISTOR_154000OHM_1_2
R45 R49 = RES: signal model: DEFAULT_RESISTOR_470.000000OHM_1_2; room: RF-AMP
R46 = RES: signal model: DEFAULT_RESISTOR_3000OHM_1_2; room: RF-AMP
R47 = RES: signal model: DEFAULT_RESISTOR_270.000000OHM_1_2; room: RF-AMP
R48 = RES: signal model: DEFAULT_RESISTOR_24000OHM_1_2; room: RF-AMP
R50 = RES: signal model: DEFAULT_RESISTOR_49.900000OHM_1_2; room: RF-AMP
R51 = RES: signal model: DEFAULT_RESISTOR_6800OHM_1_2; room: RF-AMP
R52 = RES: signal model: DEFAULT_RESISTOR_3.300000OHM_1_2; room: RF-AMP
R53 R54 = RES: signal model: DEFAULT_RESISTOR_97.600000OHM_1_2; room: CHAN1
R55 R56 = RES: signal model: DEFAULT_RESISTOR_97.600000OHM_1_2; room: CHAN2
R2000-R2012 = RES
RN1 = RES_net_8
RN2 RN3 = RES_net_8: signal model: DEFAULT_RESISTOR_PACK_4_100.000000OHM
SW1 = SW DIP-4/SM
SW2 = SW_SPST_13_24
U1 = DemoG_Interface
U2 = DemoG_CoProc
U3 = LM78L05_SO8
U4 = AD9850
U5 = VREG_TGND
U6 U8 U9 = FCT16245
U7 U48 = 74-245_20P
U10 U11 = xcf01svog20
U12 U13 = MT47H64M16
U22 U38 U39 = FF_D_8X_OE3S_20P
U29-U31 = LTM8025
U32 = TLC5602A: room: CHAN1
U33 = DG419A: room: CHAN1
U34 = TLE2037A: room: CHAN1
U35 = TLC5602A: room: CHAN2
U36 = DG419A: room: CHAN2
U37 = TLE2037A: room: CHAN2
U40-U47 = uPD431000AGW-B15: room: MEM
U49 = MAX6711
U50 = NBC12429
U51 = TPS51200
XTAL1 = OSC_SEL383
Y1 = OSC4_24NC

## Footprints (pads in the part's own frame, mm; a bottom-side part is the same pattern mirrored in y, then rotated)
C-1367550-6
  round 1.1 hole 0.6: (0,0) (0,-2) (0,-4) (0,-6) (3.1,0) (3.1,-2) (3.1,-4) (3.1,-6) (6.2,0) (6.2,-2) (6.2,-4) (6.2,-6) (76.26,0) (76.26,-2) (76.26,-4) (76.26,-6) (79.36,0) (79.36,-2) (79.36,-4) (79.36,-6) (82.46,0) (82.46,-2) (82.46,-4) (82.46,-6) A1(11.755,-6.29) A2(13.785,-6.29) A3(16.835,-6.29) A4(18.865,-6.29) A5(21.915,-6.29) A6(23.945,-6.29) A7(26.995,-6.29) A8(29.025,-6.29) A9(32.075,-6.29) A10(34.105,-6.29) A11(37.155,-6.29) A12(39.185,-6.29) A13(42.235,-6.29) A14(44.265,-6.29) A15(47.315,-6.29) A16(49.345,-6.29) A17(52.395,-6.29) A18(54.425,-6.29) A19(57.475,-6.29) A20(59.505,-6.29) A21(62.555,-6.29) A22(64.585,-6.29) A23(67.635,-6.29) A24(69.665,-6.29) B1(12.77,-4.54) B2(15.31,-4.54) B3(17.85,-4.54) B4(20.39,-4.54) B5(22.93,-4.54) B6(25.47,-4.54) B7(28.01,-4.54) B8(30.55,-4.54) B9(33.09,-4.54) B10(35.63,-4.54) B11(38.17,-4.54) B12(40.71,-4.54) B13(43.25,-4.54) B14(45.79,-4.54) B15(48.33,-4.54) B16(50.87,-4.54) B17(53.41,-4.54) B18(55.95,-4.54) B19(58.49,-4.54) B20(61.03,-4.54) B21(63.57,-4.54) B22(66.11,-4.54) B23(68.65,-4.54) B24(71.19,-4.54) C1(14.295,-2.79) C2(16.325,-2.79) C3(19.375,-2.79) C4(21.405,-2.79) C5(24.455,-2.79) C6(26.485,-2.79) C7(29.535,-2.79) C8(31.565,-2.79) C9(34.615,-2.79) C10(36.645,-2.79) C11(39.695,-2.79) C12(41.725,-2.79) C13(44.775,-2.79) C14(46.805,-2.79) C15(49.855,-2.79) C16(51.885,-2.79) C17(54.935,-2.79) C18(56.965,-2.79) C19(60.015,-2.79) C20(62.045,-2.79) C21(65.095,-2.79) C22(67.125,-2.79) C23(70.175,-2.79) C24(72.205,-2.79) D1(11.755,-0.29) D2(13.785,-0.29) D3(16.835,-0.29) D4(18.865,-0.29) D5(21.915,-0.29) D6(23.945,-0.29) D7(26.995,-0.29) D8(29.025,-0.29) D9(32.075,-0.29) D10(34.105,-0.29) D11(37.155,-0.29) D12(39.185,-0.29) D13(42.235,-0.29) D14(44.265,-0.29) D15(47.315,-0.29) D16(49.345,-0.29) D17(52.395,-0.29) D18(54.425,-0.29) D19(57.475,-0.29) D20(59.505,-0.29) D21(62.555,-0.29) D22(64.585,-0.29) D23(67.635,-0.29) D24(69.665,-0.29) E1(12.77,1.46) E2(15.31,1.46) E3(17.85,1.46) E4(20.39,1.46) E5(22.93,1.46) E6(25.47,1.46) E7(28.01,1.46) E8(30.55,1.46) E9(33.09,1.46) E10(35.63,1.46) E11(38.17,1.46) E12(40.71,1.46) E13(43.25,1.46) E14(45.79,1.46) E15(48.33,1.46) E16(50.87,1.46) E17(53.41,1.46) E18(55.95,1.46) E19(58.49,1.46) E20(61.03,1.46) E21(63.57,1.46) E22(66.11,1.46) E23(68.65,1.46) E24(71.19,1.46) F1(14.295,3.21) F2(16.325,3.21) F3(19.375,3.21) F4(21.405,3.21) F5(24.455,3.21) F6(26.485,3.21) F7(29.535,3.21) F8(31.565,3.21) F9(34.615,3.21) F10(36.645,3.21) F11(39.695,3.21) F12(41.725,3.21) F13(44.775,3.21) F14(46.805,3.21) F15(49.855,3.21) F16(51.885,3.21) F17(54.935,3.21) F18(56.965,3.21) F19(60.015,3.21) F20(62.045,3.21) F21(65.095,3.21) F22(67.125,3.21) F23(70.175,3.21) F24(72.205,3.21)
C_1_1473005_1_J1
  round 0.3 hole 1.1 unplated: (0,-33.55) (0,33.25)
  rect 4.7x4.53 smd: (12,-32.565) (12,32.565)
  rect 2.05x0.38 smd: 1(-4.1,31.5) 2(4.1,31.2) 3(-4.1,30.9) 4(4.1,30.6) 5(-4.1,30.3) 6(4.1,30) 7(-4.1,29.7) 8(4.1,29.4) 9(-4.1,29.1) 10(4.1,28.8) 11(-4.1,28.5) 12(4.1,28.2) 13(-4.1,27.9) 14(4.1,27.6) 15(-4.1,27.3) 16(4.1,27) 17(-4.1,26.7) 18(4.1,26.4) 19(-4.1,26.1) 20(4.1,25.8) 21(-4.1,25.5) 22(4.1,25.2) 23(-4.1,24.9) 24(4.1,24.6) 25(-4.1,24.3) 26(4.1,24) 27(-4.1,23.7) 28(4.1,23.4) 29(-4.1,23.1) 30(4.1,22.8) 31(-4.1,22.5) 32(4.1,22.2) 33(-4.1,21.9) 34(4.1,21.6) 35(-4.1,21.3) 36(4.1,21) 37(-4.1,20.7) 38(4.1,20.4) 39(-4.1,20.1) 40(4.1,19.8) 41(-4.1,15.9) 42(4.1,15.6) 43(-4.1,15.3) 44(4.1,15) 45(-4.1,14.7) 46(4.1,14.4) 47(-4.1,14.1) 48(4.1,13.8) 49(-4.1,13.5) 50(4.1,13.2) 51(-4.1,12.9) 52(4.1,12.6) 53(-4.1,12.3) 54(4.1,12) 55(-4.1,11.7) 56(4.1,11.4) 57(-4.1,11.1) 58(4.1,10.8) 59(-4.1,10.5) 60(4.1,10.2) 61(-4.1,9.9) 62(4.1,9.6) 63(-4.1,9.3) 64(4.1,9) 65(-4.1,8.7) 66(4.1,8.4) 67(-4.1,8.1) 68(4.1,7.8) 69(-4.1,7.5) 70(4.1,7.2) 71(-4.1,6.9) 72(4.1,6.6) 73(-4.1,6.3) 74(4.1,6) 75(-4.1,5.7) 76(4.1,5.4) 77(-4.1,5.1) 78(4.1,4.8) 79(-4.1,4.5) 80(4.1,4.2) 81(-4.1,3.9) 82(4.1,3.6) 83(-4.1,3.3) 84(4.1,3) 85(-4.1,2.7) 86(4.1,2.4) 87(-4.1,2.1) 88(4.1,1.8) 89(-4.1,1.5) 90(4.1,1.2) 91(-4.1,0.9) 92(4.1,0.6) 93(-4.1,0.3) 94(4.1,0) 95(-4.1,-0.3) 96(4.1,-0.6) 97(-4.1,-0.9) 98(4.1,-1.2) 99(-4.1,-1.5) 100(4.1,-1.8) 101(-4.1,-2.1) 102(4.1,-2.4) 103(-4.1,-2.7) 104(4.1,-3) 105(-4.1,-3.3) 106(4.1,-3.6) 107(-4.1,-3.9) 108(4.1,-4.2) 109(-4.1,-4.5) 110(4.1,-4.8) 111(-4.1,-5.1) 112(4.1,-5.4) 113(-4.1,-5.7) 114(4.1,-6) 115(-4.1,-6.3) 116(4.1,-6.6) 117(-4.1,-6.9) 118(4.1,-7.2) 119(-4.1,-7.5) 120(4.1,-7.8) 121(-4.1,-8.1) 122(4.1,-8.4) 123(-4.1,-8.7) 124(4.1,-9) 125(-4.1,-9.3) 126(4.1,-9.6) 127(-4.1,-9.9) 128(4.1,-10.2) 129(-4.1,-10.5) 130(4.1,-10.8) 131(-4.1,-11.1) 132(4.1,-11.4) 133(-4.1,-11.7) 134(4.1,-12) 135(-4.1,-12.3) 136(4.1,-12.6) 137(-4.1,-12.9) 138(4.1,-13.2) 139(-4.1,-13.5) 140(4.1,-13.8) 141(-4.1,-14.1) 142(4.1,-14.4) 143(-4.1,-14.7) 144(4.1,-15) 145(-4.1,-15.3) 146(4.1,-15.6) 147(-4.1,-15.9) 148(4.1,-16.2) 149(-4.1,-16.5) 150(4.1,-16.8) 151(-4.1,-17.1) 152(4.1,-17.4) 153(-4.1,-17.7) 154(4.1,-18) 155(-4.1,-18.3) 156(4.1,-18.6) 157(-4.1,-18.9) 158(4.1,-19.2) 159(-4.1,-19.5) 160(4.1,-19.8) 161(-4.1,-20.1) 162(4.1,-20.4) 163(-4.1,-20.7) 164(4.1,-21) 165(-4.1,-21.3) 166(4.1,-21.6) 167(-4.1,-21.9) 168(4.1,-22.2) 169(-4.1,-22.5) 170(4.1,-22.8) 171(-4.1,-23.1) 172(4.1,-23.4) 173(-4.1,-23.7) 174(4.1,-24) 175(-4.1,-24.3) 176(4.1,-24.6) 177(-4.1,-24.9) 178(4.1,-25.2) 179(-4.1,-25.5) 180(4.1,-25.8) 181(-4.1,-26.1) 182(4.1,-26.4) 183(-4.1,-26.7) 184(4.1,-27) 185(-4.1,-27.3) 186(4.1,-27.6) 187(-4.1,-27.9) 188(4.1,-28.2) 189(-4.1,-28.5) 190(4.1,-28.8) 191(-4.1,-29.1) 192(4.1,-29.4) 193(-4.1,-29.7) 194(4.1,-30) 195(-4.1,-30.3) 196(4.1,-30.6) 197(-4.1,-30.9) 198(4.1,-31.2) 199(-4.1,-31.5) 200(4.1,-31.8)
CAPC1005X56N
  rect 0.6x0.65 smd: 1(-0.5,0) 2(0.5,0)
CAPC1608X86N
  rect 0.95x1 smd: 1(-0.8,0) 2(0.8,0)
CAPC2012X70N
  rect 1.15x1.45 smd: 1(-0.9,0) 2(0.9,0)
CAPC2012X71N
  rect 1.15x1.45 smd: 1(-0.9,0) 2(0.9,0)
CAPC2012X88N
  rect 1.15x1.45 smd: 1(-0.9,0) 2(0.9,0)
CAPC2012X100N
  rect 1.15x1.45 smd: 1(-0.9,0) 2(0.9,0)
CAPC2012X140N
  rect 1.15x1.45 smd: 1(-0.9,0) 2(0.9,0)
CAPMP3216X120N
  rect 1.8x1.25 smd: 1(-1.3,0) 2(1.3,0)
CAPMP3216X180N
  rect 1.8x1.25 smd: 1(-1.3,0) 2(1.3,0)
CAPMP6032X280N
  rect 2.35x2.25 smd: 1(-2.45,0) 2(2.45,0)
CAPMP7343X310N
  rect 2.35x2.45 smd: 1(-3.1,0) 2(3.1,0)
CAPMP7343X430N
  rect 2.35x2.45 smd: 1(-3.1,0) 2(3.1,0)
DRC10_2P4X1P65
  rect 0.85x0.28 smd: 1(-1.475,1) 2(-1.475,0.5) 3(-1.475,0) 4(-1.475,-0.5) 5(-1.475,-1) 6(1.475,-1) 7(1.475,-0.5) 8(1.475,0) 9(1.475,0.5) 10(1.475,1)
FT256
  round 0.45 smd: A1(-7.5,7.5) A2(-6.5,7.5) A3(-5.5,7.5) A4(-4.5,7.5) A5(-3.5,7.5) A6(-2.5,7.5) A7(-1.5,7.5) A8(-0.5,7.5) A9(0.5,7.5) A10(1.5,7.5) A11(2.5,7.5) A12(3.5,7.5) A13(4.5,7.5) A14(5.5,7.5) A15(6.5,7.5) A16(7.5,7.5) B1(-7.5,6.5) B2(-6.5,6.5) B3(-5.5,6.5) B4(-4.5,6.5) B5(-3.5,6.5) B6(-2.5,6.5) B7(-1.5,6.5) B8(-0.5,6.5) B9(0.5,6.5) B10(1.5,6.5) B11(2.5,6.5) B12(3.5,6.5) B13(4.5,6.5) B14(5.5,6.5) B15(6.5,6.5) B16(7.5,6.5) C1(-7.5,5.5) C2(-6.5,5.5) C3(-5.5,5.5) C4(-4.5,5.5) C5(-3.5,5.5) C6(-2.5,5.5) C7(-1.5,5.5) C8(-0.5,5.5) C9(0.5,5.5) C10(1.5,5.5) C11(2.5,5.5) C12(3.5,5.5) C13(4.5,5.5) C14(5.5,5.5) C15(6.5,5.5) C16(7.5,5.5) D1(-7.5,4.5) D2(-6.5,4.5) D3(-5.5,4.5) D4(-4.5,4.5) D5(-3.5,4.5) D6(-2.5,4.5) D7(-1.5,4.5) D8(-0.5,4.5) D9(0.5,4.5) D10(1.5,4.5) D11(2.5,4.5) D12(3.5,4.5) D13(4.5,4.5) D14(5.5,4.5) D15(6.5,4.5) D16(7.5,4.5) E1(-7.5,3.5) E2(-6.5,3.5) E3(-5.5,3.5) E4(-4.5,3.5) E5(-3.5,3.5) E6(-2.5,3.5) E7(-1.5,3.5) E8(-0.5,3.5) E9(0.5,3.5) E10(1.5,3.5) E11(2.5,3.5) E12(3.5,3.5) E13(4.5,3.5) E14(5.5,3.5) E15(6.5,3.5) E16(7.5,3.5) F1(-7.5,2.5) F2(-6.5,2.5) F3(-5.5,2.5) F4(-4.5,2.5) F5(-3.5,2.5) F6(-2.5,2.5) F7(-1.5,2.5) F8(-0.5,2.5) F9(0.5,2.5) F10(1.5,2.5) F11(2.5,2.5) F12(3.5,2.5) F13(4.5,2.5) F14(5.5,2.5) F15(6.5,2.5) F16(7.5,2.5) G1(-7.5,1.5) G2(-6.5,1.5) G3(-5.5,1.5) G4(-4.5,1.5) G5(-3.5,1.5) G6(-2.5,1.5) G7(-1.5,1.5) G8(-0.5,1.5) G9(0.5,1.5) G10(1.5,1.5) G11(2.5,1.5) G12(3.5,1.5) G13(4.5,1.5) G14(5.5,1.5) G15(6.5,1.5) G16(7.5,1.5) H1(-7.5,0.5) H2(-6.5,0.5) H3(-5.5,0.5) H4(-4.5,0.5) H5(-3.5,0.5) H6(-2.5,0.5) H7(-1.5,0.5) H8(-0.5,0.5) H9(0.5,0.5) H10(1.5,0.5) H11(2.5,0.5) H12(3.5,0.5) H13(4.5,0.5) H14(5.5,0.5) H15(6.5,0.5) H16(7.5,0.5) J1(-7.5,-0.5) J2(-6.5,-0.5) J3(-5.5,-0.5) J4(-4.5,-0.5) J5(-3.5,-0.5) J6(-2.5,-0.5) J7(-1.5,-0.5) J8(-0.5,-0.5) J9(0.5,-0.5) J10(1.5,-0.5) J11(2.5,-0.5) J12(3.5,-0.5) J13(4.5,-0.5) J14(5.5,-0.5) J15(6.5,-0.5) J16(7.5,-0.5) K1(-7.5,-1.5) K2(-6.5,-1.5) K3(-5.5,-1.5) K4(-4.5,-1.5) K5(-3.5,-1.5) K6(-2.5,-1.5) K7(-1.5,-1.5) K8(-0.5,-1.5) K9(0.5,-1.5) K10(1.5,-1.5) K11(2.5,-1.5) K12(3.5,-1.5) K13(4.5,-1.5) K14(5.5,-1.5) K15(6.5,-1.5) K16(7.5,-1.5) L1(-7.5,-2.5) L2(-6.5,-2.5) L3(-5.5,-2.5) L4(-4.5,-2.5) L5(-3.5,-2.5) L6(-2.5,-2.5) L7(-1.5,-2.5) L8(-0.5,-2.5) L9(0.5,-2.5) L10(1.5,-2.5) L11(2.5,-2.5) L12(3.5,-2.5) L13(4.5,-2.5) L14(5.5,-2.5) L15(6.5,-2.5) L16(7.5,-2.5) M1(-7.5,-3.5) M2(-6.5,-3.5) M3(-5.5,-3.5) M4(-4.5,-3.5) M5(-3.5,-3.5) M6(-2.5,-3.5) M7(-1.5,-3.5) M8(-0.5,-3.5) M9(0.5,-3.5) M10(1.5,-3.5) M11(2.5,-3.5) M12(3.5,-3.5) M13(4.5,-3.5) M14(5.5,-3.5) M15(6.5,-3.5) M16(7.5,-3.5) N1(-7.5,-4.5) N2(-6.5,-4.5) N3(-5.5,-4.5) N4(-4.5,-4.5) N5(-3.5,-4.5) N6(-2.5,-4.5) N7(-1.5,-4.5) N8(-0.5,-4.5) N9(0.5,-4.5) N10(1.5,-4.5) N11(2.5,-4.5) N12(3.5,-4.5) N13(4.5,-4.5) N14(5.5,-4.5) N15(6.5,-4.5) N16(7.5,-4.5) P1(-7.5,-5.5) P2(-6.5,-5.5) P3(-5.5,-5.5) P4(-4.5,-5.5) P5(-3.5,-5.5) P6(-2.5,-5.5) P7(-1.5,-5.5) P8(-0.5,-5.5) P9(0.5,-5.5) P10(1.5,-5.5) P11(2.5,-5.5) P12(3.5,-5.5) P13(4.5,-5.5) P14(5.5,-5.5) P15(6.5,-5.5) P16(7.5,-5.5) R1(-7.5,-6.5) R2(-6.5,-6.5) R3(-5.5,-6.5) R4(-4.5,-6.5) R5(-3.5,-6.5) R6(-2.5,-6.5) R7(-1.5,-6.5) R8(-0.5,-6.5) R9(0.5,-6.5) R10(1.5,-6.5) R11(2.5,-6.5) R12(3.5,-6.5) R13(4.5,-6.5) R14(5.5,-6.5) R15(6.5,-6.5) R16(7.5,-6.5) T1(-7.5,-7.5) T2(-6.5,-7.5) T3(-5.5,-7.5) T4(-4.5,-7.5) T5(-3.5,-7.5) T6(-2.5,-7.5) T7(-1.5,-7.5) T8(-0.5,-7.5) T9(0.5,-7.5) T10(1.5,-7.5) T11(2.5,-7.5) T12(3.5,-7.5) T13(4.5,-7.5) T14(5.5,-7.5) T15(6.5,-7.5) T16(7.5,-7.5)
IND_CENTRAL_1008
  rect 1.02x2.54 smd: 1(-1.145,0) 2(1.145,0)
INDC1005X60N
  rect 0.6x0.7 smd: 1(-0.5,0) 2(0.5,0)
INDC2520X220N
  rect 0.95x2.3 smd: 1(-1.25,0) 2(1.25,0)
LEDC2012X120N
  rect 1x1.4 smd: A(0.9,0) C(-0.9,0)
LTUMODULE7X11
  custom 0.636x0.636 smd: A1(-3.81,6.35)
  rect 0.635x0.635 smd: A2(-2.54,6.35) A3(-1.27,6.35) A4(0,6.35) A5(1.27,6.35) A6(2.54,6.35) A7(3.81,6.35) B1(-3.81,5.08) B2(-2.54,5.08) B3(-1.27,5.08) B4(0,5.08) B5(1.27,5.08) B6(2.54,5.08) B7(3.81,5.08) C1(-3.81,3.81) C2(-2.54,3.81) C3(-1.27,3.81) C4(0,3.81) C5(1.27,3.81) C6(2.54,3.81) C7(3.81,3.81) D1(-3.81,2.54) D2(-2.54,2.54) D3(-1.27,2.54) D4(0,2.54) D5(1.27,2.54) D6(2.54,2.54) D7(3.81,2.54) E1(-3.81,1.27) E2(-2.54,1.27) E3(-1.27,1.27) E4(0,1.27) E5(1.27,1.27) E6(2.54,1.27) E7(3.81,1.27) F1(-3.81,0) F2(-2.54,0) F3(-1.27,0) F4(0,0) F5(1.27,0) F6(2.54,0) F7(3.81,0) G1(-3.81,-1.27) G2(-2.54,-1.27) G3(-1.27,-1.27) G4(0,-1.27) G5(1.27,-1.27) G6(2.54,-1.27) G7(3.81,-1.27) H5(1.27,-2.54) H6(2.54,-2.54) H7(3.81,-2.54) J1(-3.81,-3.81) J2(-2.54,-3.81) J3(-1.27,-3.81) J5(1.27,-3.81) J6(2.54,-3.81) J7(3.81,-3.81) K1(-3.81,-5.08) K2(-2.54,-5.08) K3(-1.27,-5.08) K5(1.27,-5.08) K6(2.54,-5.08) K7(3.81,-5.08) L1(-3.81,-6.35) L2(-2.54,-6.35) L3(-1.27,-6.35) L5(1.27,-6.35) L6(2.54,-6.35) L7(3.81,-6.35)
MT47H128M
  round 1 smd: (-4.85,-7.1) (4.85,7.1)
  round 0.45 smd: A1(-3.2,5.6) A2(-2.4,5.6) A3(-1.6,5.6) A7(1.6,5.6) A8(2.4,5.6) A9(3.2,5.6) B1(-3.2,4.8) B2(-2.4,4.8) B3(-1.6,4.8) B7(1.6,4.8) B8(2.4,4.8) B9(3.2,4.8) C1(-3.2,4) C2(-2.4,4) C3(-1.6,4) C7(1.6,4) C8(2.4,4) C9(3.2,4) D1(-3.2,3.2) D2(-2.4,3.2) D3(-1.6,3.2) D7(1.6,3.2) D8(2.4,3.2) D9(3.2,3.2) E1(-3.2,2.4) E2(-2.4,2.4) E3(-1.6,2.4) E7(1.6,2.4) E8(2.4,2.4) E9(3.2,2.4) F1(-3.2,1.6) F2(-2.4,1.6) F3(-1.6,1.6) F7(1.6,1.6) F8(2.4,1.6) F9(3.2,1.6) G1(-3.2,0.8) G2(-2.4,0.8) G3(-1.6,0.8) G7(1.6,0.8) G8(2.4,0.8) G9(3.2,0.8) H1(-3.2,0) H2(-2.4,0) H3(-1.6,0) H7(1.6,0) H8(2.4,0) H9(3.2,0) J1(-3.2,-0.8) J2(-2.4,-0.8) J3(-1.6,-0.8) J7(1.6,-0.8) J8(2.4,-0.8) J9(3.2,-0.8) K2(-2.4,-1.6) K3(-1.6,-1.6) K7(1.6,-1.6) K8(2.4,-1.6) K9(3.2,-1.6) L1(-3.2,-2.4) L2(-2.4,-2.4) L3(-1.6,-2.4) L7(1.6,-2.4) L8(2.4,-2.4) M2(-2.4,-3.2) M3(-1.6,-3.2) M7(1.6,-3.2) M8(2.4,-3.2) M9(3.2,-3.2) N1(-3.2,-4) N2(-2.4,-4) N3(-1.6,-4) N7(1.6,-4) N8(2.4,-4) P2(-2.4,-4.8) P3(-1.6,-4.8) P7(1.6,-4.8) P8(2.4,-4.8) P9(3.2,-4.8) R1(-3.2,-5.6) R2(-2.4,-5.6) R3(-1.6,-5.6) R7(1.6,-5.6) R8(2.4,-5.6)
OSCCC350X600X120N
  rect 1.45x1.95 smd: 1(-1.4,2.376) 2(-1.4,-2.374) 3(1.4,-2.374) 4(1.4,2.376)
OSCSC254P500X700X200-6N
  rect 1.95x1.6 smd: 1(-2.05,2.541) 2(-2.05,0.001) 3(-2.05,-2.539) 4(2.05,-2.539) 5(2.05,0.001) 6(2.05,2.541)
QFN50P500X500X100-33N
  rect 0.8x0.3 smd: 1(-2.475,1.75) 2(-2.475,1.25) 3(-2.475,0.75) 4(-2.475,0.25) 5(-2.475,-0.25) 6(-2.475,-0.75) 7(-2.475,-1.25) 8(-2.475,-1.75) 17(2.475,-1.75) 18(2.475,-1.25) 19(2.475,-0.75) 20(2.475,-0.25) 21(2.475,0.25) 22(2.475,0.75) 23(2.475,1.25) 24(2.475,1.75)
  rect 0.3x0.8 smd: 9(-1.75,-2.475) 10(-1.25,-2.475) 11(-0.75,-2.475) 12(-0.25,-2.475) 13(0.25,-2.475) 14(0.75,-2.475) 15(1.25,-2.475) 16(1.75,-2.475) 25(1.75,2.475) 26(1.25,2.475) 27(0.75,2.475) 28(0.25,2.475) 29(-0.25,2.475) 30(-0.75,2.475) 31(-1.25,2.475) 32(-1.75,2.475)
  rect 3.2x3.2 smd: 33(0,0)
RESC0603X26N
  rect 0.45x0.4 smd: 1(-0.35,0) 2(0.35,0)
RESC0603X30N
  rect 0.45x0.4 smd: 1(-0.35,0) 2(0.35,0)
RESC1608X50N
  rect 0.85x1 smd: 1(-0.75,0) 2(0.75,0)
RESC1608X55N
  rect 0.9x1 smd: 1(-0.8,0) 2(0.8,0)
RESC2012X50N
  rect 0.95x1.45 smd: 1(-1,0) 2(1,0)
RESC2012X60N
  rect 0.95x1.4 smd: 1(-1,0) 2(1,0)
RESC2012X70N
  rect 1.05x1.4 smd: 1(-0.95,0) 2(0.95,0)
RESC3225X70N
  rect 1.1x2.7 smd: 1(-1.5,0) 2(1.5,0)
RESNET_8
  rect 0.55x0.2 smd: 1(-0.4,0.6) 2(-0.4,0.2) 3(-0.4,-0.2) 4(-0.4,-0.6) 5(0.4,-0.6) 6(0.4,-0.2) 7(0.4,0.2) 8(0.4,0.6)
SAMTEC_TST-107-XX-X-D
  rect 1.6x1.6 hole 0.95: 1(0,0)
  round 1.6 hole 0.95: 2(0,2.54) 3(2.54,0) 4(2.54,2.54) 5(5.08,0) 6(5.08,2.54) 7(7.62,0) 8(7.62,2.54) 9(10.16,0) 10(10.16,2.54) 11(12.7,0) 12(12.7,2.54) 13(15.24,0) 14(15.24,2.54)
SMB_90
  round 1.8 hole 1.2: 1(0,0)
  round 2.3 hole 1.7: 2(-2.54,2.54) 3(2.54,2.54) 4(-2.54,-2.54) 5(2.54,-2.54)
SOG0508WG244L225
  rect 0.635x2.388 smd: 1(0,0)
  oval 0.635x2.388 smd: 2(1.27,0) 3(2.54,0) 4(3.81,0) 5(3.81,4.978) 6(2.54,4.978) 7(1.27,4.978) 8(0,4.978)
SOIC127P600X175-8N
  rect 1.55x0.6 smd: 1(-2.7,1.905) 2(-2.7,0.635) 3(-2.7,-0.635) 4(-2.7,-1.905) 5(2.7,-1.905) 6(2.7,-0.635) 7(2.7,0.635) 8(2.7,1.905)
SOIC127P1028X265-20N
  oval 1.75x0.6 smd: 1(-4.7,5.715) 2(-4.7,4.445) 3(-4.7,3.175) 4(-4.7,1.905) 5(-4.7,0.635) 6(-4.7,-0.635) 7(-4.7,-1.905) 8(-4.7,-3.175) 9(-4.7,-4.445) 10(-4.7,-5.715) 11(4.7,-5.715) 12(4.7,-4.445) 13(4.7,-3.175) 14(4.7,-1.905) 15(4.7,-0.635) 16(4.7,0.635) 17(4.7,1.905) 18(4.7,3.175) 19(4.7,4.445) 20(4.7,5.715)
SOIC127P1032X265-20AN
  oval 1.85x0.6 smd: 1(-4.75,5.715) 2(-4.75,4.445) 3(-4.75,3.175) 4(-4.75,1.905) 5(-4.75,0.635) 6(-4.75,-0.635) 7(-4.75,-1.905) 8(-4.75,-3.175) 9(-4.75,-4.445) 10(-4.75,-5.715) 11(4.75,-5.715) 12(4.75,-4.445) 13(4.75,-3.175) 14(4.75,-1.905) 15(4.75,-0.635) 16(4.75,0.635) 17(4.75,1.905) 18(4.75,3.175) 19(4.75,4.445) 20(4.75,5.715)
SOIC254P1077X800-8M
  oval 3.05x2 smd: 1(-4.6,3.81) 2(-4.6,1.27) 3(-4.6,-1.27) 4(-4.6,-3.81) 5(5.685,-3.81) 6(5.685,-1.27) 7(5.685,1.27) 8(5.685,3.81)
SOJ127P866X375-32N
  oval 2.45x0.65 smd: 1(-3.55,9.525) 2(-3.55,8.255) 3(-3.55,6.985) 4(-3.55,5.715) 5(-3.55,4.445) 6(-3.55,3.175) 7(-3.55,1.905) 8(-3.55,0.635) 9(-3.55,-0.635) 10(-3.55,-1.905) 11(-3.55,-3.175) 12(-3.55,-4.445) 13(-3.55,-5.715) 14(-3.55,-6.985) 15(-3.55,-8.255) 16(-3.55,-9.525) 17(3.55,-9.525) 18(3.55,-8.255) 19(3.55,-6.985) 20(3.55,-5.715) 21(3.55,-4.445) 22(3.55,-3.175) 23(3.55,-1.905) 24(3.55,-0.635) 25(3.55,0.635) 26(3.55,1.905) 27(3.55,3.175) 28(3.55,4.445) 29(3.55,5.715) 30(3.55,6.985) 31(3.55,8.255) 32(3.55,9.525)
SOP50P810X110-48N
  rect 1.45x0.3 smd: 1(-3.8,5.75) 2(-3.8,5.25) 3(-3.8,4.75) 4(-3.8,4.25) 5(-3.8,3.75) 6(-3.8,3.25) 7(-3.8,2.75) 8(-3.8,2.25) 9(-3.8,1.75) 10(-3.8,1.25) 11(-3.8,0.75) 12(-3.8,0.25) 13(-3.8,-0.25) 14(-3.8,-0.75) 15(-3.8,-1.25) 16(-3.8,-1.75) 17(-3.8,-2.25) 18(-3.8,-2.75) 19(-3.8,-3.25) 20(-3.8,-3.75) 21(-3.8,-4.25) 22(-3.8,-4.75) 23(-3.8,-5.25) 24(-3.8,-5.75) 25(3.8,-5.75) 26(3.8,-5.25) 27(3.8,-4.75) 28(3.8,-4.25) 29(3.8,-3.75) 30(3.8,-3.25) 31(3.8,-2.75) 32(3.8,-2.25) 33(3.8,-1.75) 34(3.8,-1.25) 35(3.8,-0.75) 36(3.8,-0.25) 37(3.8,0.25) 38(3.8,0.75) 39(3.8,1.25) 40(3.8,1.75) 41(3.8,2.25) 42(3.8,2.75) 43(3.8,3.25) 44(3.8,3.75) 45(3.8,4.25) 46(3.8,4.75) 47(3.8,5.25) 48(3.8,5.75)
SOP65P780X200-28N
  rect 1.75x0.45 smd: 1(-3.6,4.225) 2(-3.6,3.575) 3(-3.6,2.925) 4(-3.6,2.275) 5(-3.6,1.625) 6(-3.6,0.975) 7(-3.6,0.325) 8(-3.6,-0.325) 9(-3.6,-0.975) 10(-3.6,-1.625) 11(-3.6,-2.275) 12(-3.6,-2.925) 13(-3.6,-3.575) 14(-3.6,-4.225) 15(3.6,-4.225) 16(3.6,-3.575) 17(3.6,-2.925) 18(3.6,-2.275) 19(3.6,-1.625) 20(3.6,-0.975) 21(3.6,-0.325) 22(3.6,0.325) 23(3.6,0.975) 24(3.6,1.625) 25(3.6,2.275) 26(3.6,2.925) 27(3.6,3.575) 28(3.6,4.225)
SOT95P230X109-3N
  rect 0.95x0.6 smd: 1(-1.15,0.95) 2(-1.15,-0.95) 3(1.15,0)
SOT95P240X114-3N
  rect 0.95x0.6 smd: 1(-1.15,0.95) 2(-1.15,-0.95) 3(1.15,0)
SOT343N
  rect 1.1x0.45 smd: 1(-0.9,0.65) 3(0.9,-0.65) 4(0.9,0.65)
  rect 1.1x0.8 smd: 2(-0.9,-0.5)
SW_EVQ-PH_NO_GND
  rect 1x3.2 smd: 1(-2,3.4) 2(2,3.4) 3(-2,-3.4) 4(2,-3.4)
TO92
  oval 2x1 hole 0.8: 1(0,0) 2(0,-1.27) 3(0,-2.54)
TO99
  round 1.575 hole 1: 1(0,0) 2(1.803,0.737) 3(2.54,2.54) 4(1.803,4.343) 5(0,5.08) 6(-1.803,4.343) 7(-2.54,2.54) 8(-1.803,0.737)
TO230P950X240-3N
  rect 2.3x0.95 smd: 1(-4.1,2.3) 2(-4.1,-2.3)
  rect 6.9x5.55 smd: 3(1.8,0)
TO254P1410X464-4N
  rect 3x1.05 smd: 1(-6,2.54) 2(-6,0) 3(-6,-2.54)
  rect 6.9x10.5 smd: 4(4.1,0)
TOROID01_3
  round 1.397 hole 0.8: 1(0,0) 2(2.54,0) 3(5.08,0)
unnamed#2
  round 0.635 hole 3.175 unplated: (0,0)
unnamed#3
  oval 3x2 hole 2x1: (-3.175,0) (3.175,0)
  round 2 hole 0.8: (0,0)
unnamed#4
  round 1.397 hole 0.8: (13.462,8.382) (44.45,19.05) (50.546,6.604)
USB3A_FEMALE
  round 1.1 hole 0.8: 1(-3.5,-1.5) 2(-1,-1.5) 3(1,-1.5) 4(3.5,-1.5) 5(4,0) 6(2,0) 7(0,0) 8(-2,0) 9(-4,0)
  round 2.9 hole 2.3: 10(-6.57,-3.5) 11(6.57,-3.5)
XCF01SVOG20
  rect 1.5x0.45 smd: 1(-2.9,2.925) 2(-2.9,2.275) 3(-2.9,1.625) 4(-2.9,0.975) 5(-2.9,0.325) 6(-2.9,-0.325) 7(-2.9,-0.975) 8(-2.9,-1.625) 9(-2.9,-2.275) 10(-2.9,-2.925) 11(2.9,-2.925) 12(2.9,-2.275) 13(2.9,-1.625) 14(2.9,-0.975) 15(2.9,-0.325) 16(2.9,0.325) 17(2.9,0.975) 18(2.9,1.625) 19(2.9,2.275) 20(2.9,2.925)

## Nets
0V9: C2011.1 C2012.1 C2013.1 P1.2 U12.J2 U13.J2 U51.3 U51.5(VOSNS)
1V2: C63.1 C125.1 C126.1 C127.1 C128.1 C129.1 C130.1 C131.1 C132.1 C133.1 C178.1 C179.1 C180.1 C181.1 C182.1 C183.1 C184.1 C185.1 C186.1 P1.4 U1.G7 U1.G9 U1.H8 U1.H10 U1.J7 U1.J9 U1.K8 U1.K10 U2.G7 U2.G9 U2.H8 U2.H10 U2.J7 U2.J9 U2.K8 U2.K10 U29.A1 U29.A2 U29.A3 U29.A4 U29.B1 U29.B2 U29.B3 U29.B4 U29.C1 U29.C2 U29.C3 U29.C4 U29.D1 U29.D2 U29.D3 U29.D4(VOUT#D4)
1V8: C73.1 C74.1 C75.1 C76.1 C77.1 C78.1 C79.1 C80.1 C81.1 C82.1 C83.1 C84.1 C85.1 C86.1 C87.1 C88.1 C105.1 C106.1 C134.1 C135.1 C136.1 C137.1 C138.1 C139.1 C140.1 C141.1 C142.1 C143.1 C187.1 C188.1 C189.1 C190.1 C191.1 C192.1 C193.1 C194.1 C195.1 C196.1 C2014.1 C2015.1 P1.6 R2010.1 U2.B4 U2.B9 U2.B13 U2.D2 U2.G4 U2.J2 U2.K4 U2.N2(VCCO_3#N2) U2.N7 U2.N15 U2.R13 U12.A1 U12.A9 U12.C1 U12.C3 U12.C7 U12.C9 U12.E1 U12.E9 U12.G1 U12.G7 U12.G9 U12.J1 U12.J9 U12.M9 U12.R1 U13.A1 U13.A9 U13.C1 U13.C3 U13.C7 U13.C9 U13.E1 U13.E9 U13.G1 U13.G7 U13.G9 U13.J1 U13.J9 U13.M9 U13.R1 U51.2
2V5: C65.1 C89.1 C90.1 C91.1 C92.1 C93.1 C94.1 C95.1 C96.1 C97.1 C98.1 C99.1 C100.1 C101.1 C102.1 C103.1 C104.1 C116.1 C117.1 C118.1 C119.1 C120.1 C121.1 C122.1 C123.1 C124.1 C144.1 C145.1 C146.1 C147.1 C148.1 C149.1 C150.1 C151.1 C152.1 C153.1 C154.1 C155.1 C156.1 C157.1 C158.1 C159.1 C169.1 C170.1 C171.1 C172.1 C173.1 C174.1 C175.1 C176.1 C177.1 P1.14 U1.D2 U1.E5 U1.F8 U1.F11 U1.G4 U1.G10 U1.H6 U1.J2 U1.J10 U1.K4 U1.L6 U1.L9 U1.N2(VCCO_3#N2) U1.N7 U1.N10 U1.R4 U1.R8 U1.R13 U2.D7 U2.D10 U2.D15 U2.E5 U2.F8 U2.F11 U2.G10 U2.H6 U2.J10 U2.L6 U2.L9 U2.N10 U2.R4 U2.R8 U10.19(VCCO) U10.20 U11.19(VCCO) U11.20 U30.A1 U30.A2 U30.A3 U30.A4 U30.B1 U30.B2 U30.B3 U30.B4 U30.C1 U30.C2 U30.C3 U30.C4 U30.D1 U30.D2 U30.D3 U30.D4(VOUT#D4)
3V3: C67.1 C107.1 C108.1 C109.1 C110.1 C111.1 C112.1 C113.1 C114.1 C115.1 C160.1 C161.1 C162.1 C163.1 C164.1 C165.1 C166.1 C167.1 C168.1 P1.12 R2012.1 RN1.5(2) RN1.6 RN1.7 RN1.8 U1.B4 U1.B9 U1.B13 U1.D7 U1.D10 U1.D15 U1.G13 U1.J15 U1.K13 U1.N15 U2.G13 U2.J15 U2.K13 U10.18 U11.18 U29.H5 U30.H5 U31.A1 U31.A2 U31.A3 U31.A4 U31.B1 U31.B2 U31.B3 U31.B4 U31.C1 U31.C2 U31.C3 U31.C4 U31.D1 U31.D2 U31.D3 U31.D4(VOUT#D4) U51.7 U51.10
5V: C23.1 C24.1 C25.1 C26.1 C27.1 C28.1 C29.1 C30.1 U4.6(DVDD#6) U4.11 U4.18 U4.23 U5.3 XTAL1.1 XTAL1.2 XTAL1.6(VCC)
GND EARTH: C1.2 C2.2 J1.2 J1.3 J1.4 J1.5(SHIELD3) J2.2 J2.3 J2.4 J2.5(SHIELD3) J3.2 J3.3 J3.4 J3.5(SHIELD3) SW1.5(B4) SW1.6 SW1.7 SW1.8
V12N: J6.A3 J6.A4 J6.D3 J6.D4 U33.7 U34.4(VMIN) U36.7 U37.4(VMIN)
VCC: C44.1 C45.1 C46.1 C47.1 C48.1 C49.1 C50.1 C51.1 C52.1 C53.1 C54.1 C55.1 C197.1 C200.1 C2006.1 C2007.2 J5.1(VBUS) J6.A23 J6.A24 J6.D23 J6.D24 J7.31 J7.32 J7.33 J7.34 J7.35 J7.36 J7.37 J7.38 J7.81 J7.82 J7.83 J7.84 J7.85 J7.86 J7.87 J7.88 J7.131 J7.132 J7.133 J7.134 J7.135 J7.136 J7.137 J7.138 J7.181 J7.182 J7.183 J7.184 J7.185 J7.186 J7.187 J7.188 L8.1 L10.1 R27.1 R28.1 R29.1 R30.1 R2006.1 R2007.2 R2008.1 U6.7 U6.18 U6.31 U6.42 U7.20(VCC) U8.7 U8.18 U8.31 U8.42 U9.7 U9.18 U9.31 U9.42 U22.20(VCC) U32.2 U32.9(VD2) U35.2 U35.9(VD2) U38.20(VCC) U39.20(VCC) U40.32 U41.32 U42.32 U43.32 U44.32 U45.32 U46.32 U47.32 U48.20(VCC) U49.4(VCC) U50.27 U50.28 U50.32
